# Allegro board Stereo.brd
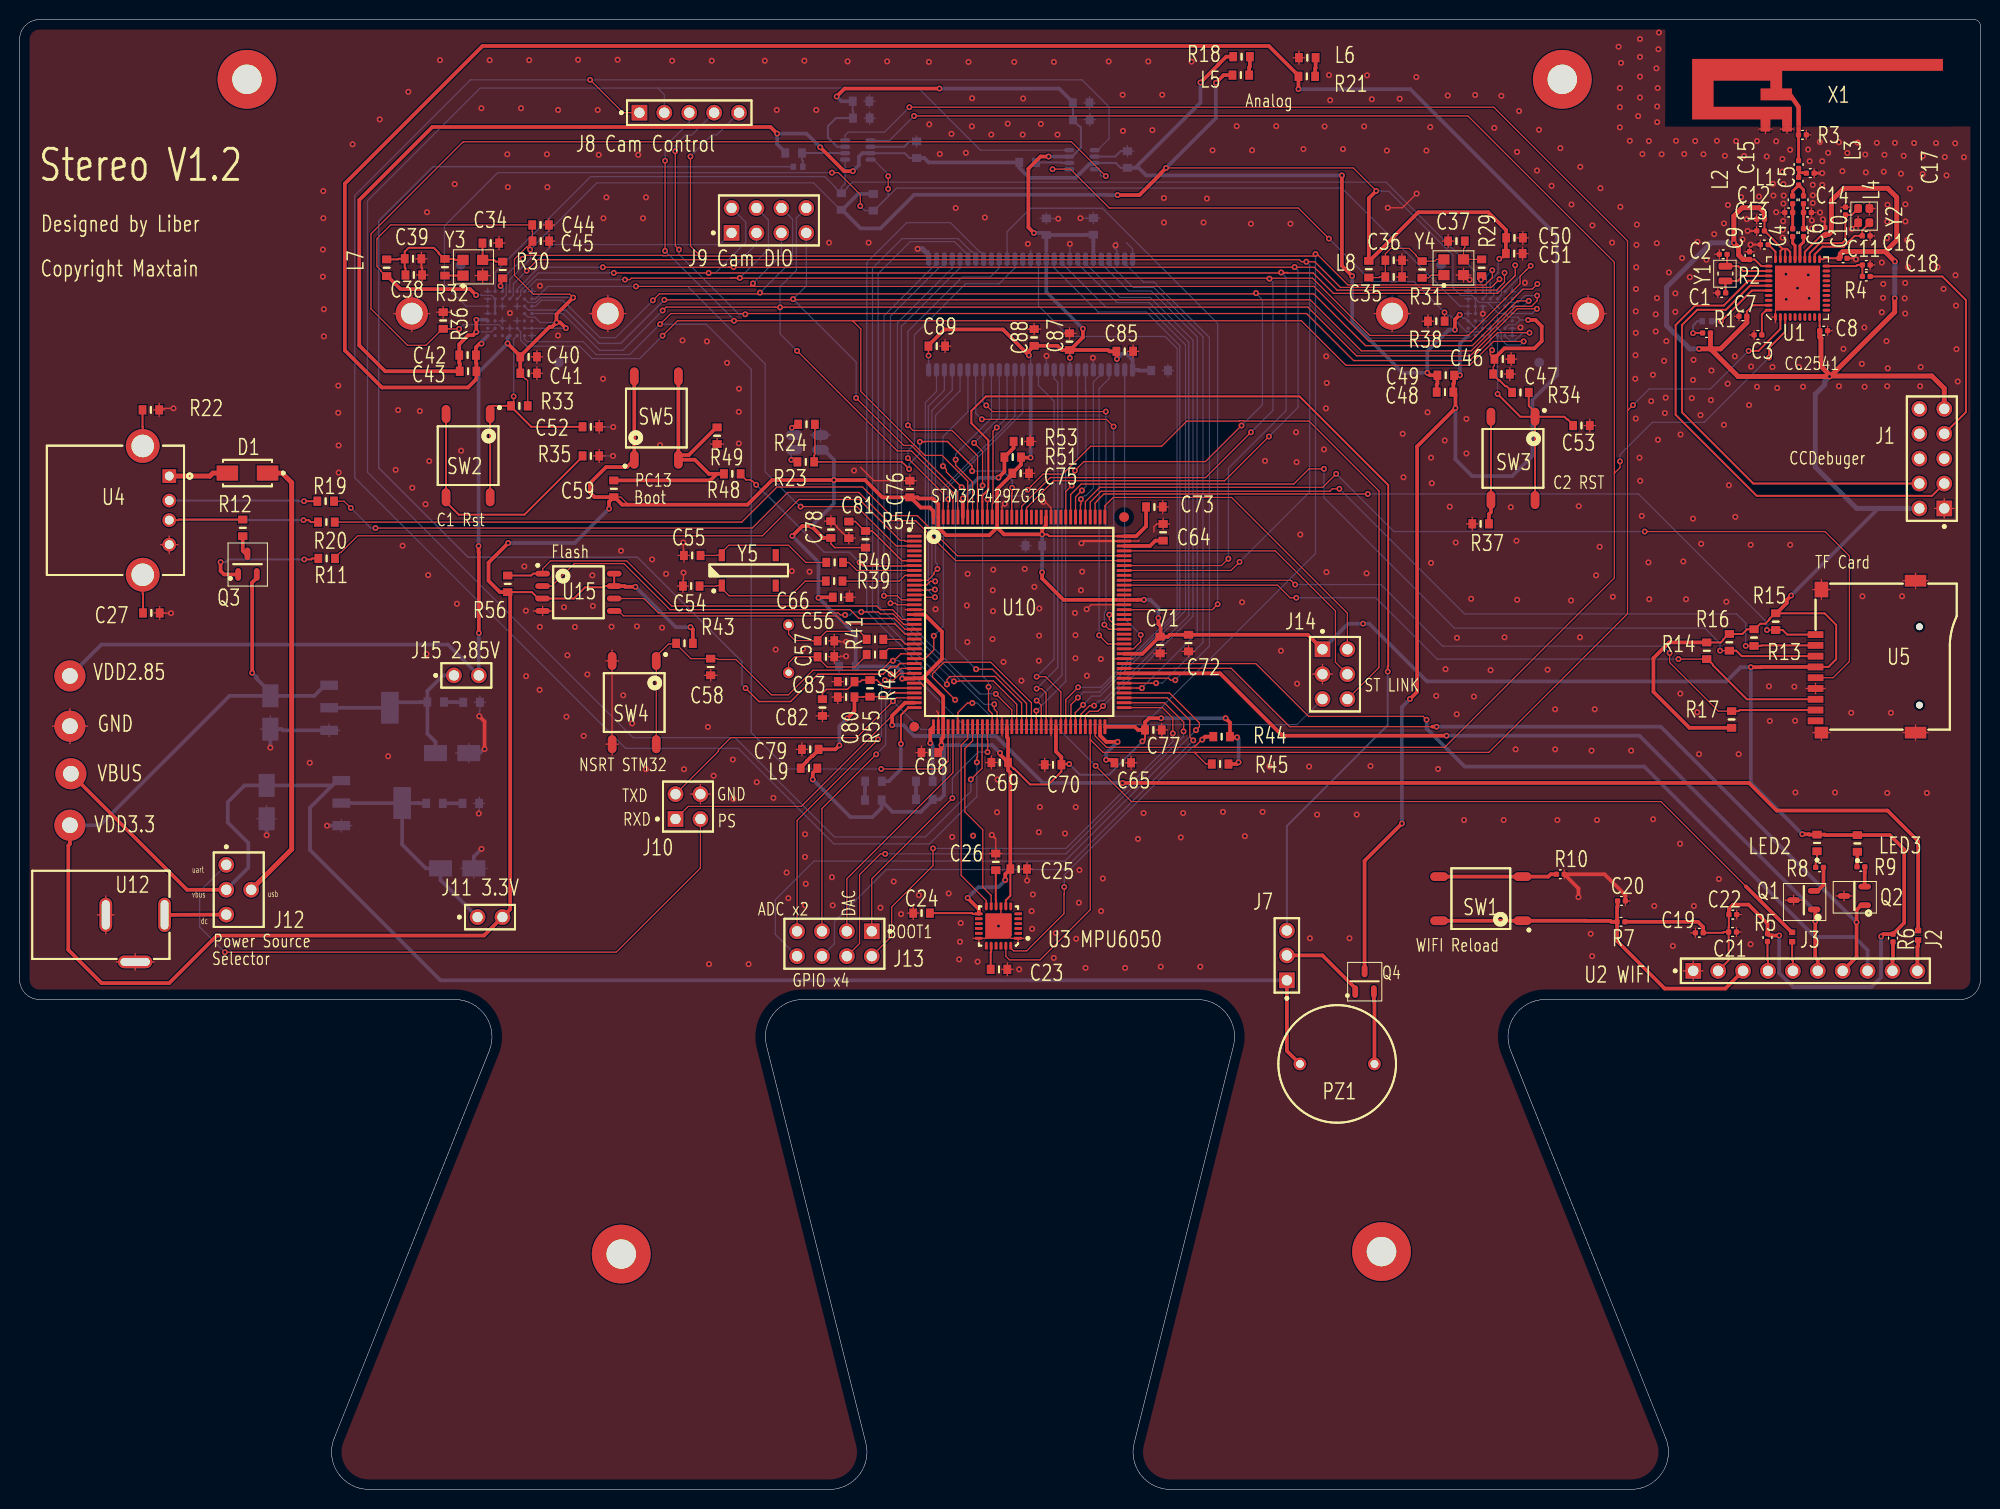
[diagram p0: board, top side]
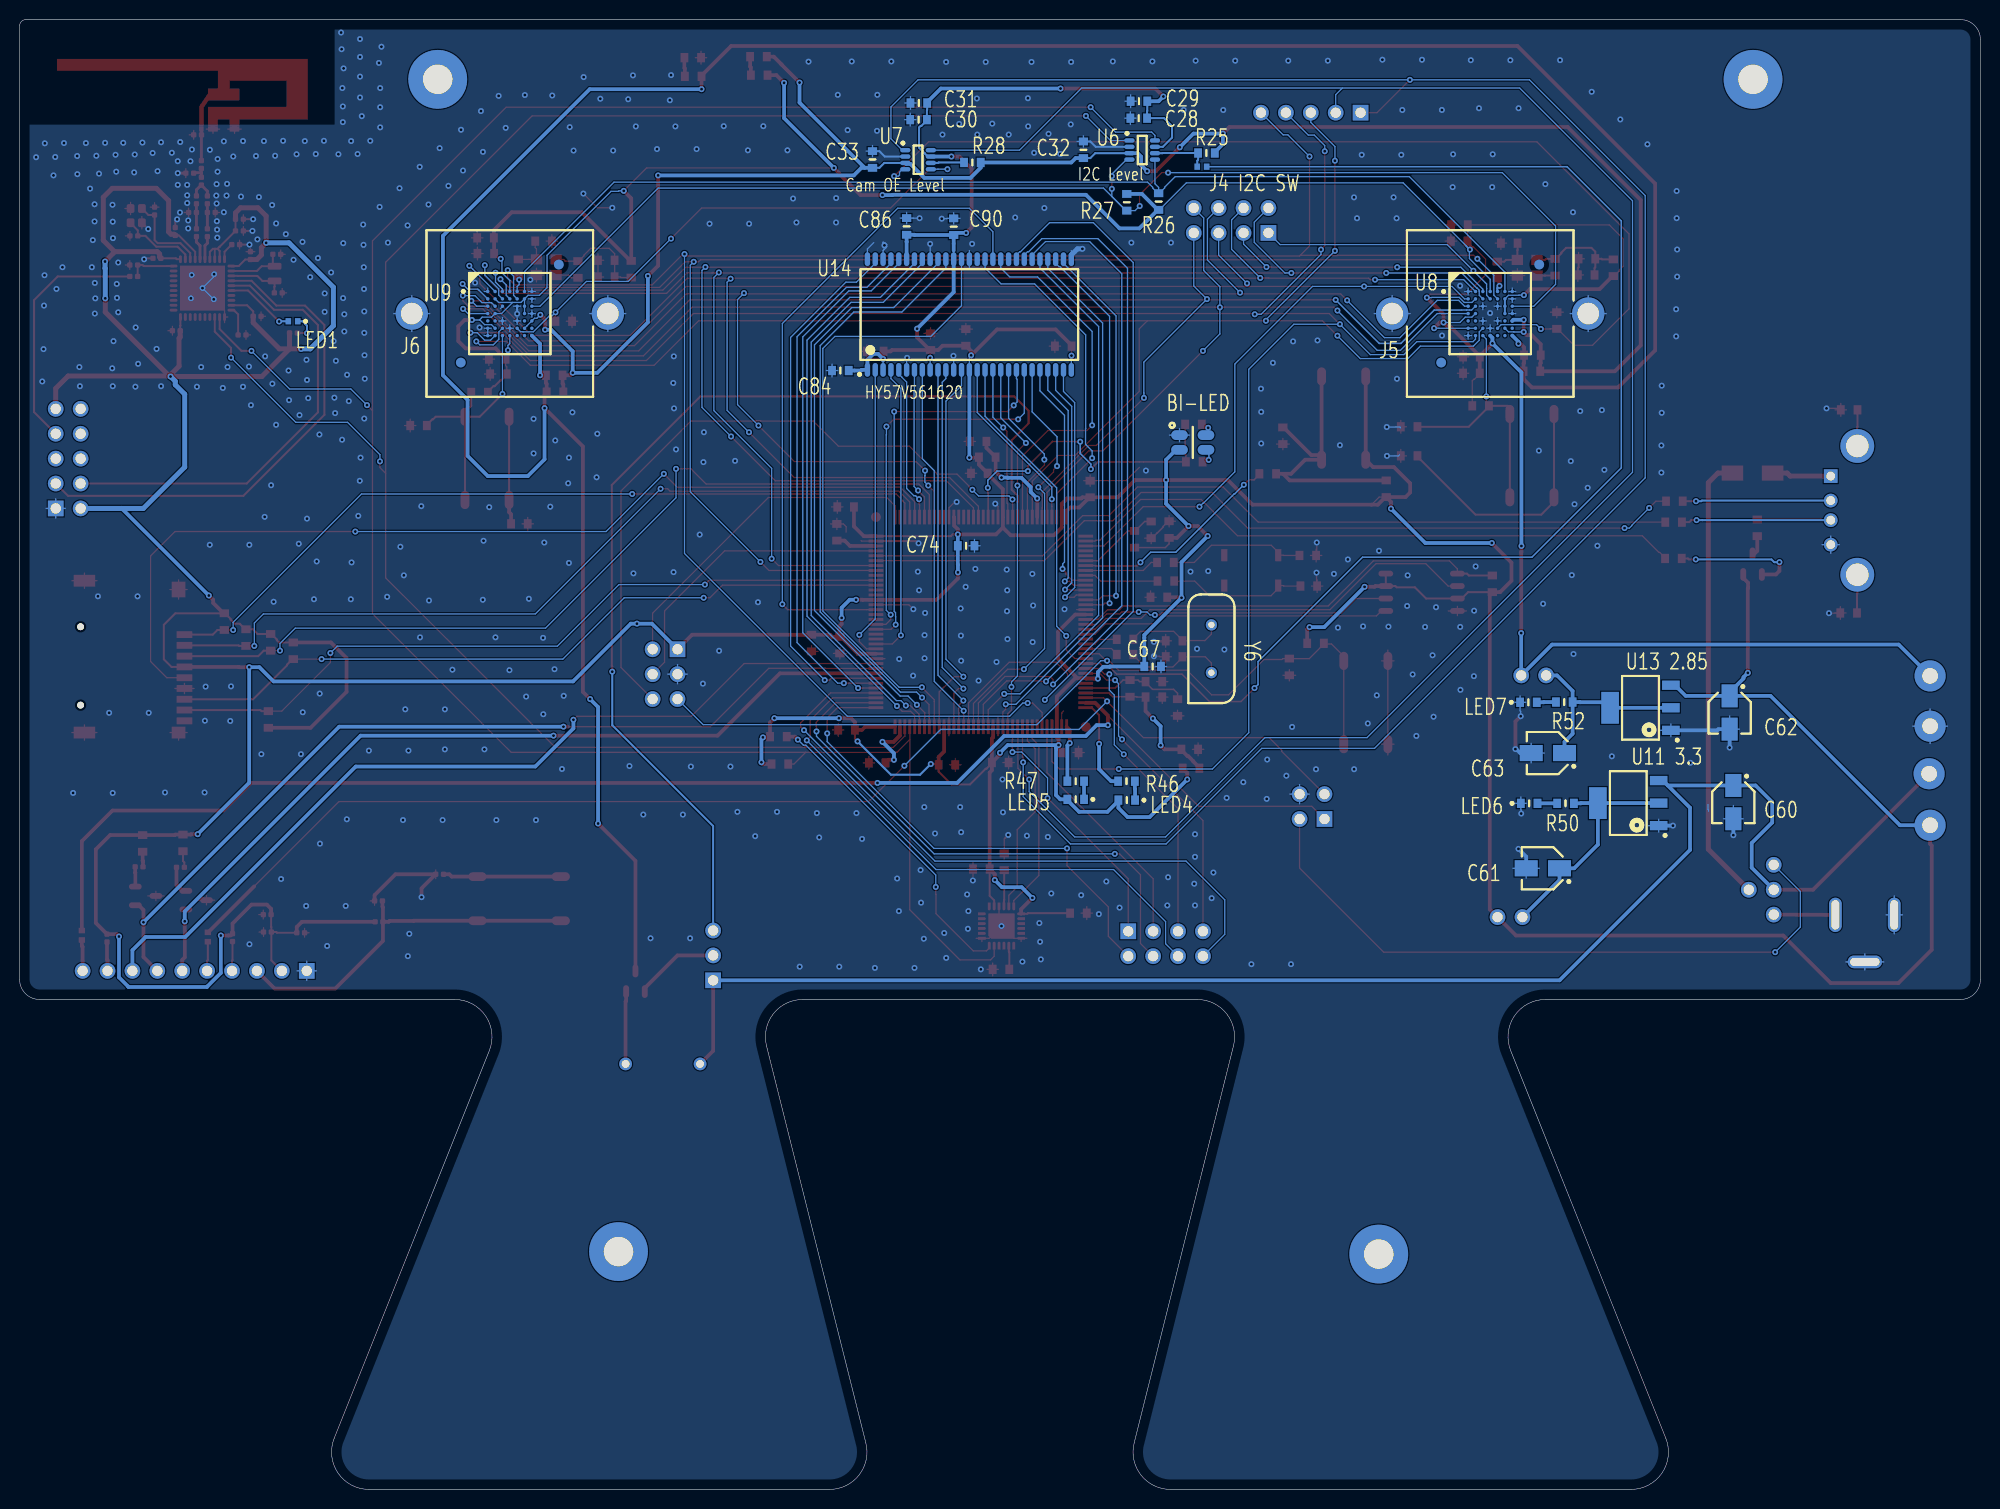
[diagram p1: board, bottom side, seen from below]

Outline 200 x 150 mm; copper layers: TOP, BOTTOM. Coordinates in mm from the lower left corner of the outline.
Outline path: 0,147.97 arc(0.6,149.4) 2.03,150 199.37,150 arc(199.81,149.81) 200,149.36 200,52.03 arc(199.4,50.6) 197.97,50 155.63,50 arc(152.47,48.33) 152.09,44.77 167.91,5.23 arc(167.53,1.67) 164.37,0 117.38,0 arc(114.38,1.47) 113.68,4.73 123.82,45.27 arc(123.12,48.53) 120.12,50 79.88,50 arc(76.88,48.53) 76.18,45.27 86.32,4.73 arc(85.62,1.47) 82.62,0 35.63,0 arc(32.47,1.67) 32.09,5.23 47.91,44.77 arc(47.53,48.33) 44.37,50 2.03,50 arc(0.6,50.6) 0,52.03 0,147.97

## Placement (name value [footprint] x y rotation side)
C1  15pF  [CAPC1005X60L]  174.02 122.11 180 top
C2  15pF  [CAPC1005X60L]  174.17 126.05 180 top
C3  1uF  [CAPC1005X60L]  176.91 117.82 0 top
C4  18pF  [CAPC1005X60L]  180.85 127.85 90 top
C5  1pF  [CAPC1005X60L]  180.85 131.2 90 top
C6  18pF  [CAPC1005X60L]  181.97 127.85 90 top
C7  1uF  [CAPC1005X60L]  176.17 119.72 180 top
C8  100nF  [CAPC1005X60L]  183.62 118.25 0 top
C9  100nF  [CAPC1005X60L]  176.45 125.51 90 top
C10  100nF  [CAPC1005X60L]  184.12 127.98 90 top
C11  100nF  [CAPC1005X60L]  185.6 125.64 0 top
C12  100nF  [CAPC1005X60L]  177.98 128.44 180 top
C13  220pF  [CAPC1005X60L]  177.98 129.63 180 top
C14  1pF  [CAPC1005X60L]  181.97 130.31 0 top
C15  1pF  [CAPC1005X60L]  182.25 134.33 0 top
C16  12pF  [CAPC1005X60L]  188.75 127.93 180 top
C17  12pF  [CAPC1005X60L]  186.23 130.06 90 top
C18  1nF  [CAPC1005X60L]  187.96 124.96 0 top
C19  47uF  [CAPC1005X60L]  171.73 56.81 180 top
C20  100nF  [CAPC1005X60L]  162.99 60.06 0 top
C21  10uF  [CAPC1005X60L]  174.32 56.88 0 top
C22  100nF  [CAPC1005X60L]  174.35 58.66 0 top
C23  2.2nF  [C0603]  99.9 53.07 0 top
C24  10nF  [C0603]  92 58.81 0 top
C25  0.1uF  [C0603]  101.91 63.31 0 top
C26  0.1uF  [C0603]  99.57 64.05 270 top
C27  DNP  [C0603]  13.44 89.45 0 top
C28  1uF  [C0603]  85.85 139.94 0 bottom
C29  0.1uF  [C0603]  85.83 141.67 0 bottom
C30  1uF  [C0603]  108.31 139.79 0 bottom
C31  0.1uF  [C0603]  108.28 141.49 0 bottom
C32  0.1uF  [C0603]  91.49 136.72 90 bottom
C33  0.1uF  [C0603]  113 135.72 90 bottom
C34  33pF  [C0603]  48.06 127.19 0 top
C35  10uF  [C0603]  140.16 123.74 0 top
C36  100nF  [C0603]  140.16 125.44 0 top
C37  33pF  [C0603]  146.56 127.39 180 top
C38  10uF  [C0603]  40.21 123.94 0 top
C39  100nF  [C0603]  40.13 125.59 0 top
C40  0.1uF  [C0603]  51.92 115.58 0 top
C41  1uF  [C0603]  51.92 113.91 0 top
C42  0.1uF  [C0603]  45.69 115.76 0 top
C43  1uF  [C0603]  45.75 114.11 0 top
C44  0.1uF  [C0603]  53.14 129.04 0 top
C45  1uF  [C0603]  53.16 127.39 0 top
C46  0.1uF  [C0603]  151.28 115.35 0 top
C47  1uF  [C0603]  151.16 113.83 0 top
C48  0.1uF  [C0603]  145.39 111.98 0 top
C49  1uF  [C0603]  145.47 113.7 0 top
C50  0.1uF  [C0603]  152.48 127.72 0 top
C51  1uF  [C0603]  152.45 126.12 0 top
C52  100nF  [C0603]  58.27 108.45 0 top
C53  100nF  [C0603]  159.31 108.57 0 top
C54  6.8pF  [C0603]  68.5 92.19 180 top
C55  6.8pF  [C0603]  68.61 95.31 180 top
C56  20pF  [C0603]  82.25 86.6 0 top
C57  20pF  [C0603]  82.25 84.98 0 top
C58  100nF  [C0603]  70.49 83.93 270 top
C59  100nF  [C0603]  60.6 102.12 90 top
C60  10uF ALUMINUM  [CAP_ALUM]  25.2 70.14 270 bottom
C61  22uF ALUMINUM  [CAP_ALUM]  44.63 63.39 0 bottom
C62  10uF ALUMINUM  [CAP_ALUM]  25.58 79.29 270 bottom
C63  22uF ALUMINUM  [CAP_ALUM]  44.12 75.15 0 bottom
C64  2.2uF  [C0603]  116.64 97.68 90 top
C65  2.2uF  [C0603]  112.52 74.16 0 top
C66  100nF  [C0603]  83.79 91.05 0 top
C67  100nF  [C0603]  84.43 83.99 180 bottom
C68  100nF  [C0603]  92.84 75.2 180 top
C69  100nF  [C0603]  99.97 74.18 180 top
C70  100nF  [C0603]  105.41 73.95 180 top
C71  100nF  [C0603]  116.33 86.17 270 top
C72  100nF  [C0603]  119.23 86.37 270 top
C73  100nF  [C0603]  115.75 100.27 0 top
C74  100nF  [C0603]  103.45 96.3 180 bottom
C75  100nF  [C0603]  102.11 103.7 0 top
C76  100nF  [C0603]  90.81 102.1 90 top
C77  100nF  [C0603]  115.65 77.51 0 top
C78  100nF  [C0603]  82.75 97.96 90 top
C79  1uF  [C0603]  80.65 75.53 180 top
C80  100nF  [C0603]  84.3 80.86 180 top
C81  1uF  [C0603]  84.58 97.93 90 top
C82  1uF  [C0603]  81.89 79.79 90 top
C83  100nF  [C0603]  84.3 82.44 0 top
C84  100nF  [C0603]  116.28 114.19 0 bottom
C85  100nF  [C0603]  112.73 116.14 0 top
C86  100nF  [C0603]  109.53 128.89 90 bottom
C87  100nF  [C0603]  107.09 117.13 90 top
C88  100nF  [C0603]  103.48 117.56 90 top
C89  100nF  [C0603]  93.55 116.67 0 top
C90  100nF  [C0603]  104.72 128.87 90 bottom
D1  IN5819  [1N5819_SS12]  23.24 103.72 180 top
D2  LED BI-COLOUR  [LED_BICOLOR]  80.34 106.85 180 bottom
J1  CC_Debugger  [HEADER2X5]  196.32 100.11 90 top
J2  STRXD2USRTX  [SWJ]  193.65 56.55 90 top
J3  STTXD2USR  [SWJ]  180.8 56.38 270 top
J4  JUMPER  [SWJ]  79.4 134.99 180 bottom
J5  CameraBase  [CSBASE]  50 120 180 bottom
J6  CameraBase  [CSBASE]  150 120 180 bottom
J7  HEADER 3  [HEADER1X3S]  129.26 51.96 90 top
J8  CAMERA CONTROL  [HEADER1X5S]  63.22 140.5 0 top
J9  CAMERA DATA  [HEADER2X4S]  72.62 128.23 0 top
J10  UART  [HEADER2X2S]  66.9 68.41 0 top
J11  Idd  [HEADER1X2S]  46.71 58.41 0 top
J12  Power Source  [HEADERSW3]  21.08 63.74 270 top
J13  HEADER 4X2  [HEADER2X4S]  86.92 56.96 180 top
J14  ST-LINK  [HEADER2X3S]  132.89 85.74 270 top
J15  Idd  [HEADER1X2S]  44.3 83.07 0 top
L1  2nH  [INDC1005X60L]  180.85 130.31 180 top
L2  1nH  [INDC1005X60L]  181.46 133.11 90 top
L3  3nH  [INDC1005X60L]  181.46 134.81 90 top
L4  2nH  [INDC1005X60L]  181.97 131.2 90 top
L5  10uH  [L0603]  124.56 144.34 180 top
L6  10uH  [L0603]  131.34 146.11 0 top
L7  10uH  [L0603]  37.44 124.68 90 top
L8  10uH  [L0603]  137.62 124.52 270 top
L9  BEAD  [L0603]  80.52 73.6 180 top
LED1  RED  [LED0402]  172.11 119.21 0 bottom
LED2  LED  [LED0603]  183.34 65.98 90 top
LED3  LED  [LED0603]  187.45 65.93 90 top
LED4  RED  [LED0603]  87.07 70.35 0 bottom
LED5  RED  [LED0603]  92.28 70.42 0 bottom
LED6  RED  [LED0603]  46.03 70.02 180 bottom
LED7  GREEN  [LED0603]  46.1 80.33 180 bottom
NOREF  -  [unnamed]  138.91 24.27 0 top
NOREF#2  -  [unnamed]  23.19 143.9 0 top
NOREF#3  -  [unnamed]  157.35 143.9 0 top
NOREF#4  -  [unnamed]  61.37 24.02 0 top
PZ1  Bell  [BUZZ]  134.39 43.42 0 top
Q1  -  [8550]  181.99 60.13 180 top
Q2  8550PNP  [8550]  187.15 60.57 180 top
Q3  -  [8550]  23.24 94.42 90 top
Q4  -  [8550]  137.19 51.85 90 top
R1  330R  [RESC1005X40L]  172.47 118.02 180 top
R2  56K-1%  [RESC1005X40L]  178.36 127.04 180 top
R3  0,DNM  [RESC1005X40L]  182.25 138.24 180 top
R4  2K7  [RESC1005X40L]  187.96 123.79 0 top
R5  10K  [RESC1005X40L]  178.28 55.92 90 top
R6  10K  [RESC1005X40L]  191.08 55.87 90 top
R7  10K  [RESC1005X40L]  162.94 57.92 0 top
R8  510  [RESC1005X40L]  184 63.49 180 top
R9  510  [RESC1005X40L]  188.21 63.54 180 top
R10  100R  [RESC1005X40L]  157.56 62.78 180 top
R11  10K  [R0603]  31.32 95.01 180 top
R12  1K5  [R0603]  22.76 98.13 90 top
R13  10K  [R0603]  176.91 86.93 90 top
R14  10K  [R0603]  172.09 85.59 90 top
R15  10K  [R0603]  179.12 88.56 90 top
R16  10K  [R0603]  174.4 86.45 90 top
R17  10K  [R0603]  174.63 78.57 270 top
R18  0ohm  [R0603]  124.64 146.22 0 top
R19  0R  [R0603]  31.22 100.85 180 top
R20  0R  [R0603]  31.29 98.72 180 top
R21  0ohm  [R0603]  131.29 144.21 180 top
R22  DNP  [R0603]  13.39 110.17 180 top
R23  330R  [R0603]  80.19 104.86 180 top
R24  330R  [R0603]  80.26 108.7 180 top
R25  4K7  [R0603]  78.94 136.39 180 bottom
R26  1K5  [R0603]  83.82 131.43 270 bottom
R27  1K5  [R0603]  87.07 131.36 90 bottom
R28  4K7  [R0603]  102.82 135.42 0 bottom
R29  33R  [R0603]  149.12 124.68 270 top
R30  33R  [R0603]  49.28 124.45 270 top
R31  10K  [R0603]  143.05 124.5 90 top
R32  10K  [R0603]  43.38 124.73 90 top
R33  10K  [R0603]  50.98 110.58 0 top
R34  10K  [R0603]  153.09 111.95 180 top
R35  100R  [R0603]  58.27 105.47 180 top
R36  10K  [R0603]  43.21 119.29 270 top
R37  100R  [R0603]  149.02 98.54 0 top
R38  10K  [R0603]  144.5 119.21 0 top
R39  0R  [R0603]  83.08 92.7 180 top
R40  0R  [R0603]  83.13 94.6 180 top
R41  0R  [R0603]  87.25 86.75 180 top
R42  220R  [R0603]  87.25 85.2 180 top
R43  100K  [R0603]  67.82 86.35 0 top
R44  1K5  [R0603]  122.61 76.82 0 top
R45  1K5  [R0603]  122.45 74.03 0 top
R46  510R  [R0603]  87.1 72.28 180 bottom
R47  510R  [R0603]  92.28 72.28 180 bottom
R48  330R  [R0603]  72.7 103.64 0 top
R49  100K  [R0603]  71.15 107.53 90 top
R50  1K  [R0603]  42.32 70.02 180 bottom
R51  NA  [R0603]  101.3 105.35 0 top
R52  1K  [R0603]  42.44 80.35 180 bottom
R53  510  [R0603]  102.24 106.95 180 top
R54  0R  [R0603]  86.28 96.96 270 top
R55  0R  [R0603]  86.74 81.75 90 top
R56  4K7  [R0603]  49.78 92.42 270 top
SW1  SWREST  [SWKEY]  149.05 60.29 180 top
SW2  SWREST  [SWKEY]  45.75 105.5 270 top
SW3  SWREST  [SWKEY]  152.32 105.22 270 top
SW4  SwRst  [SWKEY]  62.69 80.3 270 top
SW5  SwRst  [SWKEY]  64.95 109.33 90 top
TP1  VBUS  [TP]  5.23 73.04 0 top
TP2  VDD3.3  [TP]  5.13 67.78 0 top
TP3  VDD2.85  [TP]  5.13 83.02 0 top
TP4  GND  [TP]  5.13 77.89 0 top
U1  CC2541-VQFN  [QFNFC50P600X600X100-41L]  179.1 119.65 0 top
U2  USR-WIFI232  [USRWIFI]  170.71 52.92 0 top
U3  -  [MPU6050]  99.85 57.49 180 top
U4  USB  [USBA]  15.27 103.42 270 top
U5  TFCard  [TF]  183.19 87.24 90 top
U6  MAX3372E  [MAX3372]  85.5 136.69 180 bottom
U7  MAX3372E  [MAX3372]  108.36 135.7 180 bottom
U8  -  [MT9M111]  50 120 180 bottom
U9  -  [MT9M111]  150 120 180 bottom
U10  -  [STM32F429ZGT6]  101.96 88.53 0 top
U11  LT1117-3.3  [LT1117]  35.92 70.04 0 bottom
U12  DC005  [DC_005]  8.79 58.64 0 top
U13  LT1117-2.85  [LT1117]  34.67 79.77 0 bottom
U14  HY57V561620  [HY57V561620T]  103.12 119.9 90 bottom
U15  -  [W25X16]  57 91.55 0 top
X1  2.4GHz  [ANTENNA_DN007]  181.46 138.82 0 top
Y1  32.768KHz  [XTAL_FC12MN]  173.99 123.33 90 top
Y2  32MHz  [XTAL_FA128L]  187.53 130.72 270 top
Y3  SG210_54MHz  [OSC50MHZ]  46.23 124.68 90 top
Y4  SG210_54MHz  [OSC50MHZ]  146.28 124.73 90 top
Y5  Crystal_MC306-G-06Q-32.768  [MC306_32768]  74.37 93.79 90 top
Y6  8MHz  [CRYSTAL_HC49S_8MHZ]  78.44 85.79 90 bottom

## Library data of the parts
C1-C3 C16-C18 = CAP-NP
C4-C15 = CAPACITOR
C19 C21 C22 C60-C63 = CAP POL
C20 C23-C59 C64-C90 = CAP NP
D1 = DIODE_0
D2 = LED BI-COLOUR_1
J1 = CC_Debugger
J2-J4 J11 J15 = JUMPER
J5 J6 = HEADER 2
J7 = HEADER 3
J8 = HEADER 5
J9 = HEADER 8
J10 = HEADER 2X2
J12 = HEADER 4_1
J13 = HEADER 4X2
J14 = HEADER 3X2
L1-L8 = INDUCTOR
L9 = BEAD
LED1 = LED_2
LED2-LED7 = LED_1
PZ1 = PIEZO BUZZER_0
Q1-Q4 = PNP BCE_1
R1-R56 = R
SW1-SW5 = SW PUSHBUTTON-SPST-2
TP1-TP4 = TEST POINT
U1 = CC2541
U2 = USR-WIFI232
U3 = MPU6050_1
U4 = USB_4
U5 = TFCard_0
U6 U7 = MAX3372E_1
U8 U9 = MT9M111
U10 = STM32F429ZGT6_0
U11 U13 = LT1117_2
U12 = DC005
U14 = HY57V561620
U15 = W25X16
X1 = ANTENNA_DN007
Y1 = Crystal_2PIN
Y2 = Crystal_4PIN_US
Y3 Y4 = SG210_54MHz
Y5 = CRYSTAL1-4/SM
Y6 = CRYSTAL

## Footprints (pads in the part's own frame, mm; a bottom-side part is the same pattern mirrored in y, then rotated)
1N5819_SS12
  rect 2.2x1.55 smd: A(2.05,0) C(-2.05,0)
8550
  oval 1.3x0.6 smd: 1(-1.05,0.95) 2(-1.05,-0.95) 3(1.05,0)
ANTENNA_DN007
  rect 0.46x0.5 smd: 1(0,0)
  rect 1x0.5 smd: 2(-1.18,0) 3(-3.38,0)
BUZZ
  round 1.3 hole 0.8: 1(-3.8,0) 2(3.8,0)
C0603
  rect 0.8x0.95 smd: 1(-0.85,0) 2(0.85,0)
CAP_ALUM
  rect 2.35x1.65 smd: 1(-1.7,0) 2(1.7,0)
CAPC1005X60L
  custom 0.55x0.54 smd: 1(0,0) 2(0.8,0)
CRYSTAL_HC49S_8MHZ
  round 1.15 hole 0.65: 1(-2.44,0) 2(2.44,0)
CSBASE
  round 3.3 hole 2.2: 1(-10,0) 2(10,0)
DC_005
  oval 3.5x1.3 hole 3x0.8: 2(3,-4.8)
  oval 1.3x3.5 hole 0.8x3: 3(0,0) 4(6,0)
HEADER1X2S
  round 1.6 hole 1.05: 1(0,0) 2(2.54,0)
HEADER1X3S
  rect 1.6x1.6 hole 1.05: 1(0,0)
  round 1.6 hole 1.05: 2(2.54,0) 3(5.08,0)
HEADER1X5S
  rect 1.6x1.6 hole 1.05: 1(0,0)
  round 1.6 hole 1.05: 2(2.54,0) 3(5.08,0) 4(7.62,0) 5(10.16,0)
HEADER2X2S
  rect 1.6x1.6 hole 1.05: 1(0,0)
  round 1.6 hole 1.05: 2(0,2.54) 3(2.54,0) 4(2.54,2.54)
HEADER2X3S
  rect 1.6x1.6 hole 1.05: 1(0,0)
  round 1.6 hole 1.05: 2(0,2.54) 3(2.54,0) 4(2.54,2.54) 5(5.08,0) 6(5.08,2.54)
HEADER2X4S
  rect 1.6x1.6 hole 1.05: 1(0,0)
  round 1.6 hole 1.05: 2(0,2.54) 3(2.54,0) 4(2.54,2.54) 5(5.08,0) 6(5.08,2.54) 7(7.62,0) 8(7.62,2.54)
HEADER2X5
  rect 1.6x1.6 hole 1.05: 1(0,0)
  round 1.6 hole 1.05: 2(0,2.54) 3(2.54,0) 4(2.54,2.54) 5(5.08,0) 6(5.08,2.54) 7(7.62,0) 8(7.62,2.54) 9(10.16,0) 10(10.16,2.54)
HEADERSW3
  round 1.6 hole 1.05: 1(2.54,2.54) 2(0,0) 3(5.08,0) 4(2.54,0)
HY57V561620T
  oval 1.4x0.55 smd: 1(-5.65,10.4) 2(-5.65,9.6) 3(-5.65,8.8) 4(-5.65,8) 5(-5.65,7.2) 6(-5.65,6.4) 7(-5.65,5.6) 8(-5.65,4.8) 9(-5.65,4) 10(-5.65,3.2) 11(-5.65,2.4) 12(-5.65,1.6) 13(-5.65,0.8) 14(-5.65,0) 15(-5.65,-0.8) 16(-5.65,-1.6) 17(-5.65,-2.4) 18(-5.65,-3.2) 19(-5.65,-4) 20(-5.65,-4.8) 21(-5.65,-5.6) 22(-5.65,-6.4) 23(-5.65,-7.2) 24(-5.65,-8) 25(-5.65,-8.8) 26(-5.65,-9.6) 27(-5.65,-10.4) 28(5.65,-10.4) 29(5.65,-9.6) 30(5.65,-8.8) 31(5.65,-8) 32(5.65,-7.2) 33(5.65,-6.4) 34(5.65,-5.6) 35(5.65,-4.8) 36(5.65,-4) 37(5.65,-3.2) 38(5.65,-2.4) 39(5.65,-1.6) 40(5.65,-0.8) 41(5.65,0) 42(5.65,0.8) 43(5.65,1.6) 44(5.65,2.4) 45(5.65,3.2) 46(5.65,4) 47(5.65,4.8) 48(5.65,5.6) 49(5.65,6.4) 50(5.65,7.2) 51(5.65,8) 52(5.65,8.8) 53(5.65,9.6) 54(5.65,10.4)
INDC1005X60L
  custom 0.55x0.54 smd: 1(0,0) 2(0.8,0)
L0603
  rect 0.8x0.95 smd: 1(-0.85,0) 2(0.85,0)
LED0402
  rect 0.57x0.64 smd: 1(-0.48,0) 2(0.48,0)
LED0603
  rect 0.8x0.95 smd: A(0.85,0) C(-0.85,0)
LED_BICOLOR
  oval 1.7x1 smd: 1(-1.35,0.75) 2(1.35,0.75) 3(1.35,-0.75) 4(-1.35,-0.75)
LT1117
  rect 1.8x0.95 smd: 1(-3.1,2.3) 2(-3.1,0) 3(-3.1,-2.3)
  rect 1.8x3.25 smd: 4(3.1,0)
MAX3372
  oval 1.05x0.45 smd: 1(-1.3,0.975) 2(-1.3,0.325) 3(-1.3,-0.325) 4(-1.3,-0.975) 5(1.3,-0.975) 6(1.3,-0.325) 7(1.3,0.325) 8(1.3,0.975)
MC306_32768
  rect 1.24x0.64 smd: 1(-1.55,2.75) 2(-1.55,-2.75) 3(1.55,-2.75) 4(1.55,2.75)
MPU6050
  rect 0.8x0.3 smd: 1(-2,1.25)
  custom 0.8x0.3 smd: 2(-2,0.75) 3(-2,0.25) 4(-2,-0.25) 5(-2,-0.75) 6(-2,-1.25) 13(2,-1.25) 14(2,-0.75) 15(2,-0.25) 16(2,0.25) 17(2,0.75) 18(2,1.25)
  custom 0.3x0.8 smd: 7(-1.25,-2) 8(-0.75,-2) 9(-0.25,-2) 10(0.25,-2) 11(0.75,-2) 12(1.25,-2) 19(1.25,2) 20(0.75,2) 21(0.25,2) 22(-0.25,2) 23(-0.75,2) 24(-1.25,2)
  custom 2.7x2.6 smd: 25(0,0)
MT9M111
  round 1 smd: (-5,-5) (5,5)
  round 0.35 smd: A1(-2.25,2.25) A2(-1.5,2.25) A3(-0.75,2.25) A4(0,2.25) A5(0.75,2.25) A6(1.5,2.25) A7(2.25,2.25) B1(-2.25,1.5) B2(-1.5,1.5) B3(-0.75,1.5) B4(0,1.5) B5(0.75,1.5) B6(1.5,1.5) B7(2.25,1.5) C1(-2.25,0.75) C2(-1.5,0.75) C3(-0.75,0.75) C5(0.75,0.75) C6(1.5,0.75) C7(2.25,0.75) D1(-2.25,0) D2(-1.5,0) D6(1.5,0) D7(2.25,0) E1(-2.25,-0.75) E2(-1.5,-0.75) E3(-0.75,-0.75) E5(0.75,-0.75) E6(1.5,-0.75) E7(2.25,-0.75) F1(-2.25,-1.5) F2(-1.5,-1.5) F3(-0.75,-1.5) F4(0,-1.5) F5(0.75,-1.5) F6(1.5,-1.5) F7(2.25,-1.5) G1(-2.25,-2.25) G2(-1.5,-2.25) G3(-0.75,-2.25) G4(0,-2.25) G5(0.75,-2.25) G6(1.5,-2.25) G7(2.25,-2.25)
OSC50MHZ
  rect 1.05x1.15 smd: 1(-0.8,1) 2(-0.8,-1) 3(0.8,-1) 4(0.8,1)
QFNFC50P600X600X100-41L
  oval 0.3x0.8 smd: 1(0,0) 2(0.5,0) 3(1,0) 4(1.5,0) 5(2,0) 6(2.5,0) 7(3,0) 8(3.5,0) 9(4,0) 10(4.5,0) 21(4.5,5.9) 22(4,5.9) 23(3.5,5.9) 24(3,5.9) 25(2.5,5.9) 26(2,5.9) 27(1.5,5.9) 28(1,5.9) 29(0.5,5.9) 30(0,5.9)
  oval 0.8x0.3 smd: 11(5.2,0.7) 12(5.2,1.2) 13(5.2,1.7) 14(5.2,2.2) 15(5.2,2.7) 16(5.2,3.2) 17(5.2,3.7) 18(5.2,4.2) 19(5.2,4.7) 20(5.2,5.2) 31(-0.7,5.2) 32(-0.7,4.7) 33(-0.7,4.2) 34(-0.7,3.7) 35(-0.7,3.2) 36(-0.7,2.7) 37(-0.7,2.2) 38(-0.7,1.7) 39(-0.7,1.2) 40(-0.7,0.7)
  rect 4.6x4.6 smd: 41(2.25,2.95)
R0603
  rect 0.8x0.95 smd: 1(-0.85,0) 2(0.85,0)
RESC1005X40L
  custom 0.55x0.54 smd: 1(0,0) 2(0.8,0)
STM32F429ZGT6
  round 1 smd: (-10.7,-10.7) (10.7,10.7)
  rect 1.5x0.3 smd: 1(-10.7,8.75) 2(-10.7,8.25) 3(-10.7,7.75) 4(-10.7,7.25) 5(-10.7,6.75) 6(-10.7,6.25) 7(-10.7,5.75) 8(-10.7,5.25) 9(-10.7,4.75) 10(-10.7,4.25) 11(-10.7,3.75) 12(-10.7,3.25) 13(-10.7,2.75) 14(-10.7,2.25) 15(-10.7,1.75) 16(-10.7,1.25) 17(-10.7,0.75) 18(-10.7,0.25) 19(-10.7,-0.25) 20(-10.7,-0.75) 21(-10.7,-1.25) 22(-10.7,-1.75) 23(-10.7,-2.25) 24(-10.7,-2.75) 25(-10.7,-3.25) 26(-10.7,-3.75) 27(-10.7,-4.25) 28(-10.7,-4.75) 29(-10.7,-5.25) 30(-10.7,-5.75) 31(-10.7,-6.25) 32(-10.7,-6.75) 33(-10.7,-7.25) 34(-10.7,-7.75) 35(-10.7,-8.25) 36(-10.7,-8.75) 73(10.7,-8.75) 74(10.7,-8.25) 75(10.7,-7.75) 76(10.7,-7.25) 77(10.7,-6.75) 78(10.7,-6.25) 79(10.7,-5.75) 80(10.7,-5.25) 81(10.7,-4.75) 82(10.7,-4.25) 83(10.7,-3.75) 84(10.7,-3.25) 85(10.7,-2.75) 86(10.7,-2.25) 87(10.7,-1.75) 88(10.7,-1.25) 89(10.7,-0.75) 90(10.7,-0.25) 91(10.7,0.25) 92(10.7,0.75) 93(10.7,1.25) 94(10.7,1.75) 95(10.7,2.25) 96(10.7,2.75) 97(10.7,3.25) 98(10.7,3.75) 99(10.7,4.25) 100(10.7,4.75) 101(10.7,5.25) 102(10.7,5.75) 103(10.7,6.25) 104(10.7,6.75) 105(10.7,7.25) 106(10.7,7.75) 107(10.7,8.25) 108(10.7,8.75)
  rect 0.3x1.5 smd: 37(-8.75,-10.7) 38(-8.25,-10.7) 39(-7.75,-10.7) 40(-7.25,-10.7) 41(-6.75,-10.7) 42(-6.25,-10.7) 43(-5.75,-10.7) 44(-5.25,-10.7) 45(-4.75,-10.7) 46(-4.25,-10.7) 47(-3.75,-10.7) 48(-3.25,-10.7) 49(-2.75,-10.7) 50(-2.25,-10.7) 51(-1.75,-10.7) 52(-1.25,-10.7) 53(-0.75,-10.7) 54(-0.25,-10.7) 55(0.25,-10.7) 56(0.75,-10.7) 57(1.25,-10.7) 58(1.75,-10.7) 59(2.25,-10.7) 60(2.75,-10.7) 61(3.25,-10.7) 62(3.75,-10.7) 63(4.25,-10.7) 64(4.75,-10.7) 65(5.25,-10.7) 66(5.75,-10.7) 67(6.25,-10.7) 68(6.75,-10.7) 69(7.25,-10.7) 70(7.75,-10.7) 71(8.25,-10.7) 72(8.75,-10.7) 109(8.75,10.7) 110(8.25,10.7) 111(7.75,10.7) 112(7.25,10.7) 113(6.75,10.7) 114(6.25,10.7) 115(5.75,10.7) 116(5.25,10.7) 117(4.75,10.7) 118(4.25,10.7) 119(3.75,10.7) 120(3.25,10.7) 121(2.75,10.7) 122(2.25,10.7) 123(1.75,10.7) 124(1.25,10.7) 125(0.75,10.7) 126(0.25,10.7) 127(-0.25,10.7) 128(-0.75,10.7) 129(-1.25,10.7) 130(-1.75,10.7) 131(-2.25,10.7) 132(-2.75,10.7) 133(-3.25,10.7) 134(-3.75,10.7) 135(-4.25,10.7) 136(-4.75,10.7) 137(-5.25,10.7) 138(-5.75,10.7) 139(-6.25,10.7) 140(-6.75,10.7) 141(-7.25,10.7) 142(-7.75,10.7) 143(-8.25,10.7) 144(-8.75,10.7)
SWJ
  rect 0.57x0.64 smd: 1(-0.48,0) 2(0.48,0)
SWKEY
  oval 1.85x0.9 smd: 1(-4.25,2.25) 2(4.25,2.25) 3(4.25,-2.25) 4(-4.25,-2.25)
TF
  round 0.7 hole 0.9 unplated: (-7.2,-10.6) (0.8,-10.6)
  rect 0.7x1.6 smd: 1(0,0) 2(-1.1,0) 3(-2.2,0) 4(-3.3,0) 5(-4.4,0) 6(-5.5,0) 7(-6.6,0) 8(-7.7,0) 9(-8.8,0)
  rect 1.2x2.2 smd: 10(5.5,-10.2) 11(-10,-10.2)
  rect 1.6x1.4 smd: 12(4.6,-0.6)
  rect 1.2x1.4 smd: 13(-10,-0.6)
TP
  round 3.175 hole 1.6: 1(0,0)
unnamed
  round 6 hole 3: (0,0)
USBA
  rect 1.4x1.4 hole 0.9: 1(0,0)
  round 1.4 hole 0.9: 2(2.5,0) 3(4.5,0) 4(7,0)
  round 3.45 hole 2.3: M1(-3.07,-2.71) M2(10.07,-2.71)
USRWIFI
  rect 1.6x1.6 hole 1.05: 1(0,0)
  round 1.6 hole 1.05: 2(2.54,0) 3(5.08,0) 4(7.62,0) 5(10.16,0) 6(12.7,0) 7(15.24,0) 8(17.78,0) 9(20.32,0) 10(22.86,0)
W25X16
  oval 1.5x0.6 smd: 1(-3.65,1.905) 2(-3.65,0.635) 3(-3.65,-0.635) 4(-3.65,-1.905) 5(3.65,-1.905) 6(3.65,-0.635) 7(3.65,0.635) 8(3.65,1.905)
XTAL_FA128L
  custom 0.9x0.798 smd: 1(0,0) 2(1.45,0) 3(1.45,1.15) 4(0,1.15)
XTAL_FC12MN
  custom 0.7x1.402 smd: 1(0,0) 2(1.5,0)

## Nets
AGND: C42.2 C43.2 C48.2 C49.2 Q4.3(C) R21.2 U8.G7(AGND) U9.G7(AGND)
GND: C1.2 C2.2 C3.1 C7.2 C8.2 C9.2 C10.2 C11.2 C12.2 C13.2 C14.2 C15.2 C16.1 C17.2 C18.2 C19.2 C20.2 C21.2 C22.2 C23.2 C24.1 C25.2 C26.1 C27.2 C28.2 C29.2 C30.2 C31.2 C32.2 C33.2 C34.2 C35.2 C36.2 C37.2 C38.2 C39.2 C40.2 C41.2 C44.2 C45.2 C46.2 C47.2 C50.2 C51.2 C52.2 C53.2 C54.2 C55.2 C56.2 C57.2 C58.2 C60.2 C61.2 C62.2 C63.2 C64.2 C65.2 C66.2 C67.2 C68.2 C69.2 C70.2 C71.2 C72.2 C73.2 C74.2 C75.2 C76.2 C77.2 C78.2 C79.2 C80.2 C81.1 C82.1 C83.1 C84.2 C85.2 C86.2 C87.2 C88.2 C89.2 C90.2 D2.1 J1.1(GND) J5.1 J5.2 J6.1 J6.2 J10.4(2) J14.3 L1.2 L6.1 LED6.C(CATHODE) LED7.C(CATHODE) Q1.3(C) Q2.3(C) R2.2 R3.1 R10.1 R22.1 R35.1 R36.1 R37.1 R38.1 R49.1 R53.1 SW4.3 SW4.4 TP4.1 U1.1(GND#1) U1.41(GND#41) U2.1(GND) U3.1(CLKIN) U3.9(AD0) U3.18(GND#18) U3.25(GND#25) U4.4(GND) U5.6(VSS) U5.10(GND#10) U5.11(GND#11) U5.12(GND#12) U5.13(GND#13) U6.2(GND) U7.2(GND) U8.A1(DGND#A1) U8.A7(DGND#A7) U8.B7(DGNDQ#B7) U8.C3(DGNDQ#C3) U8.C5(DGNDQ#C5) U8.D7(DGND#D7) U8.E3(DGNDQ#E3) U8.E5(DGNDQ#E5) U8.F4(STAND_BY) U8.G1(DGND#G1) U9.A1(DGND#A1) U9.A7(DGND#A7) U9.B7(DGNDQ#B7) U9.C3(DGNDQ#C3) U9.C5(DGNDQ#C5) U9.D7(DGND#D7) U9.E3(DGNDQ#E3) U9.E5(DGNDQ#E5) U9.F1(SADDR) U9.F4(STAND_BY) U9.G1(DGND#G1) U10.16(VSS#16) U10.31(VSSA) U10.38(VSS#38) U10.51(VSS#51) U10.61(VSS#61) U10.83(VSS#83) U10.94(VSS#94) U10.107(VSS#107) U10.120(VSS#120) U10.130(VSS#130) U11.1(GND) U12.2(GND#2) U12.3(GND#3) U13.1(GND) U14.6(VSSQ#6) U14.12(VSSQ#12) U14.28(VSS#28) U14.41(VSS#41) U14.46(VSSQ#46) U14.52(VSSQ#52) U14.54(VSS#54) U15.4(GND) X1.2(GND_2) X1.3(GND_3) Y2.2 Y2.4 Y3.2(GND) Y4.2(GND)
VBAT: C81.2 R54.1 U10.6(VBAT)
VBUS: C60.1 J7.1 J12.4 PZ1.1(+) TP1.1 U11.3(IN)
VDD2.85: C40.1 C41.1 C44.1 C45.1 C46.1 C47.1 C50.1 C51.1 J15.2 L5.2 L7.1 L8.1 R26.2 R27.2 R33.2 R34.2 TP3.1 U8.A4(VDDQ#A4) U8.B2(VDD#B2) U8.B6(VDD#B6) U8.C6(VDDQ#C6) U8.D2(VDDQ#D2) U8.D6(VDDQ#D6) U8.F1(SADDR) U8.F2(VDD#F2) U8.G4(VDDQ#G4) U9.A4(VDDQ#A4) U9.B2(VDD#B2) U9.B6(VDD#B6) U9.C6(VDDQ#C6) U9.D2(VDDQ#D2) U9.D6(VDDQ#D6) U9.F2(VDD#F2) U9.G4(VDDQ#G4)
A0: U10.10(PF0) U14.23(A0)
A1: U10.11(PF1) U14.24(A1)
A2: U10.12(PF2) U14.25(A2)
A3: U10.13(PF3) U14.26(A3)
A4: U10.14(PF4) U14.29(A4)
A5: U10.15(PF5) U14.30(A5)
A6: U10.50(PF12) U14.31(A6)
A7: U10.53(PF13) U14.32(A7)
A8: U10.54(PF14) U14.33(A8)
A9: U10.55(PF15) U14.34(A9)
A10: U10.56(PG0) U14.22(A10/AP)
A11: U10.57(PG1) U14.35(A11)
ADC0: J13.5 U10.28(PC2)
ADC1: J13.7 U10.29(PC3)
BA0: U10.89(PG4) U14.20(BA0)
BA1: U10.90(PG5) U14.21(BA1)
BEEP: J7.3 U10.134(PB4)
BOOT0: R51.1 R53.2 U10.138(BOOT0)
BOOT1: J13.1 U10.48(PB2/BOOT1)
C1D0: J9.1 U8.B4(DOUT0) U9.B4(DOUT0) U10.101(PA9)
C1D1: J9.2 U8.B3(DOUT1) U9.B3(DOUT1) U10.102(PA10)
C1D2: J9.3 U8.A3(DOUT2) U9.A3(DOUT2) U10.125(PG10)
C1D3: J9.4 U8.A2(DOUT3) U9.A2(DOUT3) U10.126(PG11)
C1D4: J9.5 U8.B1(DOUT4) U9.B1(DOUT4) U10.3(PE4)
C1D5: J9.6 U8.C1(DOUT5) U9.C1(DOUT5) U10.117(PD3)
C1D6: J9.7 U8.C2(DOUT6) U9.C2(DOUT6) U10.139(PB8)
C1D7: J9.8 U8.D1(DOUT7) U9.D1(DOUT7) U10.140(PB9)
C1HSYC: J8.4 U8.G2(LINE_VALID) U9.G2(LINE_VALID) U10.40(PA4)
C1OE: J8.1 U7.1(VCC2) U10.46(PB0)
C1OE#: R36.2 U7.4(VL2) U8.F5(O\E\)
C1PIXCLK: J8.5 U8.B5(PIXCLK) U9.B5(PIXCLK) U10.42(PA6)
C1VSYN: J8.3 U8.F3(FRAME_VALID) U9.F3(FRAME_VALID) U10.137(PB7)
C1XCLK: R30.2 U8.A5(CLK_IN)
C2OE: J8.2 U7.8(VCC1) U10.47(PB1)
C2OE#: R38.2 U7.5(VL1) U9.F5(O\E\)
C2XCLK: R29.2 U9.A5(CLK_IN)
CC2541_RF_N: C4.1 U1.26(RF_N)
CC2541_RF_P: C6.1 U1.25(RF_P)
CI2C: J4.2 U10.27(PC1)
CSCL: R26.1 U6.5(VL1) U8.A6(SCLK) U9.A6(SCLK)
CSDA: R27.1 U6.4(VL2) U8.C7(SDATA) U9.C7(SDATA)
D0: U10.85(PD14) U14.2(DQ0)
D1: U10.86(PD15) U14.4(DQ1)
D2: U10.114(PD0) U14.5(DQ2)
D3: U10.115(PD1) U14.7(DQ3)
D4: U10.58(PE7) U14.8(DQ4)
D5: U10.59(PE8) U14.10(DQ5)
D6: U10.60(PE9) U14.11(DQ6)
D7: U10.63(PE10) U14.13(DQ7)
D8: U10.64(PE11) U14.42(DQ8)
D9: U10.65(PE12) U14.44(DQ9)
D10: U10.66(PE13) U14.45(DQ10)
D11: U10.67(PE14) U14.47(DQ11)
D12: U10.68(PE15) U14.48(DQ12)
D13: U10.77(PD8) U14.50(DQ13)
D14: U10.78(PD9) U14.51(DQ14)
D15: U10.79(PD10) U14.53(DQ15)
DAC: J13.3 U10.41(PA5)
DC: J1.3(DC) U1.34(P2_2/DC)
DD: J1.4(DD) U1.35(P2_1/DD)
DUAL_LED: R23.1 R24.1 U10.128(PG13)
INLED1: R46.1 U10.36(PA2)
INLED2: R47.1 U10.37(PA3)
MPU_FSY: U3.11(FSYNC) U10.45(PC5)
MPU_INT: U3.12(INT) U10.44(PC4)
NBL0: U10.141(PE0) U14.15(LDQM)
NBL1: U10.142(PE1) U14.39(UDQM)
NLINKU: Q1.1(B) U2.6(PWM_1) U10.80(PD11)
NREADYU: Q2.1(B) U2.7(PWM_2) U10.81(PD12)
NRELOADU: C20.1 R7.1 SW1.1 SW1.2 U2.3(NRELOAD)
NRST: C58.1 J14.5 R43.1 SW4.1 SW4.2 U10.25(NRST)
NRST_258567: J1.7(NRST) R4.2
P2_0: LED1.2(CATHODE) U1.36(P2_0)
PA13: J14.4 U10.105(PA13)
PA14: J14.2 U10.109(PA14)
PB3: J14.6 U10.133(PB3)
PB12: J13.2 U10.73(PB12)
PB13: J13.4 U10.74(PB13)
PB14: J13.6 U10.75(PB14)
PB15: J13.8 U10.76(PB15)
PC13: R48.2 U10.7(PC13-WKUP2)
PC14: R40.1 U10.8(PC14-OSC32_IN)
PC15: R39.1 U10.9(PC15-OSC32_OUT)
PH0: R41.1 U10.23(PH0-OSC_IN)
PH1: R42.1 U10.24(PH1-OSC_OUT)
POWERFROMUART: J10.3(1) J12.2
POWERFROMUSB: D1.C(K) J12.1
SDCKE1: U10.135(PB5) U14.37(CKE)
SDCLK: U10.93(PG8) U14.38(CLK)
SDIO_CLK: U5.5(CLK) U10.113(PC12)
SDIO_CMD: R16.1 U5.3(CMD) U10.116(PD2)
SDIO_D0: R14.1 U5.7(DAT0) U10.98(PC8)
SDIO_D1: R17.1 U5.8(DAT1) U10.99(PC9)
SDIO_D2: R15.1 U5.1(DAT2) U10.111(PC10)
SDIO_D3: R13.1 U5.2(CD/DAT3) U10.112(PC11)
SDNCAS: U10.132(PG15) U14.17(C\A\S\)
SDNE1: U10.136(PB6) U14.19(C\S\)
SDNRAS: U10.49(PF11) U14.18(R\A\S\)
SDNWE: U10.26(PC0) U14.16(W\E\)
STRXD: J2.2 J10.1(3) U10.35(PA1)
STSCL: R45.1 U1.2(SCL) U3.23(SCL) U6.8(VCC1) U10.69(PB10)
STSDA: R44.1 U1.3(SDA) U3.24(SDA) U6.1(VCC2) U10.70(PB11)
STSPI_MISO: U10.20(PF8) U15.2(DO)
STSPI_MOSI: U10.21(PF9) U15.5(DIO)
STSPI_NSS: R56.1 U10.18(PF6) U15.1(C\S\)
STSPI_SCK: U10.19(PF7) U15.6(CLK)
STTXD: J3.1 J10.2(4) U10.34(PA0-WKUP1)
STVDD: C7.1 C8.1 C9.1 C10.1 C11.1 C12.1 C13.1 C19.1 C21.1 C22.1 C24.2 C25.1 C28.1 C29.1 C30.1 C31.1 C59.1 C62.1 C66.1 C67.1 C68.1 C69.1 C70.1 C71.1 C72.1 C73.1 C74.1 C75.1 C76.1 C77.1 C78.1 C84.1 C85.1 C86.1 C87.1 C88.1 C89.1 C90.1 D2.4 J1.2(VCC) J1.9(3V3) J11.2 J14.1 L9.1 LED2.A(ANODE) LED3.A(ANODE) LED4.A(ANODE) LED5.A(ANODE) Q3.2(E) R1.1 R5.2 R6.2 R7.2 R13.2 R14.2 R15.2 R16.2 R17.2 R43.2 R44.2 R45.2 R51.2 R54.2 R56.2 SW5.1 SW5.2 TP2.1 U1.10(DVDD2) U1.21(AVDD5) U1.24(AVDD3) U1.27(AVDD2) U1.28(AVDD1) U1.29(AVDD4) U1.31(AVDD6) U1.39(DVDD1) U2.2(DVDD) U3.8(VLOGIC) U3.13(VDD) U5.4(VDD) U6.7(VCC) U7.7(VCC) U10.17(VDD#17) U10.30(VDD#30) U10.39(VDD#39) U10.52(VDD#52) U10.62(VDD#62) U10.72(VDD#72) U10.84(VDD#84) U10.95(VDD#95) U10.108(VDD#108) U10.121(VDD#121) U10.131(VDD#131) U10.143(PDR_ON) U10.144(VDD#144) U13.3(IN) U14.1(VDD#1) U14.3(VDDQ#3) U14.9(VDDQ#9) U14.14(VDD#14) U14.27(VDD#27) U14.43(VDDQ#43) U14.49(VDDQ#49) U15.3(W\P\) U15.7(H\O\L\D\) U15.8(VCC)
STVDDA: C79.1 C80.1 L9.2 R55.1 U10.33(VDDA)
STVREF+: C82.2 C83.2 R55.2 U10.32(VREF+)
USB_DM: R19.1 U10.103(PA11)
USB_DP: R20.1 U10.104(PA12)
USB_M: R11.1 U10.2(PE3)
VAA2.85: C32.1 C33.1 C42.1 C43.1 C48.1 C49.1 R18.1 R25.2 R28.1 U6.3(VL) U7.3(VL) U8.E7(VAAPIX) U8.F6(VAA) U9.E7(VAAPIX) U9.F6(VAA)
VCAP1: C65.1 U10.71(VCAP_1)
VCAP2: C64.1 U10.106(VCAP_2)
WPSU: U2.8(PWM_3) U10.82(PD13)
N258513: C1.1 U1.33(P2_3/OSC32K_Q2) Y1.1
N258517: C2.1 U1.32(P2_4/OSC32K_Q1) Y1.2
N258521: R2.1 U1.30(RBIAS)
N258553: C3.2 U1.40(DCOUPL)
N258627: C17.1 U1.23(XOSC_Q2) Y2.1
N258635: C16.2 U1.22(XOSC_Q1) Y2.3
N258759: C18.1 R4.1 U1.20(RST_N)
N258825: LED1.1(ANODE) R1.2
N259215: C4.2 C5.1 L1.1
N259219: C6.2 C14.1 L4.1
N259239: C5.2 L2.1 L4.2
N259251: C15.1 L2.2 L3.1
N259437: L3.2 R3.2 X1.1(FEED_1)
N265978: C54.1 R39.2 Y5.1
N266951: C55.1 R40.2 Y5.4
N267195: C56.1 R41.2 Y6.2
N267337: C57.1 R42.2 Y6.1
N285985: C59.2 R48.1 R49.2 SW5.3 SW5.4
N300508: C23.1 U3.20(CPOUT)
N300650: C26.2 U3.10(REGOUT)
N328917: R12.2 R20.2 U4.3(D+/DP)
N329621: R19.2 U4.2(D-/DM)
N331482: Q3.3(C) R12.1
N331520: Q3.1(B) R11.2
N332992: R22.2 U4.M1(SHL)
N333081: C27.1 U4.M2(SHELL)
N336943: D1.A U4.1(VCC)
N348606: R5.1 U2.4(NRESET)
N348624: R6.1 U2.9(PWR_SW)
N350346: J2.1 U2.10(UART_TX)
N350383: J3.2 U2.5(UART_RX)
N351997: R10.2 SW1.3 SW1.4
N352841: Q1.2(E) R8.1
N352845: Q2.2(E) R9.1
N358002: C52.1 R33.1 SW2.1 SW2.2 U8.G3(R\E\S\E\T\)
N366341: C38.1 C39.1 L7.2 R32.2 Y3.4(VCC)
N366455: R32.1 Y3.1(EN)
N367148: C34.1 R30.1 Y3.3(OUT)
N372779: C35.1 C36.1 L8.2 R31.2 Y4.4(VCC)
N372831: R31.1 Y4.1(EN)
N372891: C37.1 R29.1 Y4.3(OUT)
N373213: C53.1 R34.1 SW3.1 SW3.2 U9.G3(R\E\S\E\T\)
N373269: R37.2 SW3.3 SW3.4
N391929: PZ1.2(-) Q4.2(E)
N392285: J7.2 Q4.1(B)
N419290: C61.1 J11.1 R50.2 U11.2(OUT#2) U11.4(OUT#4)
N419382: LED6.A(ANODE) R50.1
N421353: C63.1 J15.1 R52.2 U13.2(OUT#2) U13.4(OUT#4)
N421387: LED7.A(ANODE) R52.1
N423737: J12.3 U12.4(DCV5)
N432954: D2.3 R23.2
N432958: D2.2 R24.2
N446981: J4.1 R25.1 U6.6(E\N\)
N453683: R28.2 U7.6(E\N\)
N463104: L6.2 R21.1
N463426: L5.1 R18.2
N486322: R35.2 SW2.3 SW2.4
N3522421: LED2.C(CATHODE) R8.2
N3522681: LED3.C(CATHODE) R9.2
N3536300: LED4.C(CATHODE) R46.2
N3536460: LED5.C(CATHODE) R47.2

Pads without a net: J1 5 6 8 10; U1 4 5 6 7 8 9 11 12 13 14 15 16 17 18 19 37 38; U3 2 3 4 5 6 7 14 15 16 17 19 21 22; U5 9; U8 E1 E2 E6 F7 G5 G6; U9 E1 E2 E6 F7 G5 G6; U10 1 4 5 22 43 87 88 91 92 96 97 100 110 118 119 122 123 124 127 129; U14 36 40; Y5 2 3

## Via types
v1: diameter 0.61, hole 0.3, TOP to BOTTOM, 808 vias

## Routing (per net, layer and track width the routed paths; a pad name or vN(x,y) marks a point on that pad's centre or on a via; arc(x,y) is an arc through that point)
AGND: length 283.6
  TOP w0.381: v1(146.91,113.7) C49.2 146.32,112.91 146.24,112.83 C48.2 146.46,111.76 v1(146.46,110.35) 142.55,106.44 142.55,81.39 v1(141.81,80.66) ; v1(141,67.96) 137.19,64.15 Q4.3 ; v1(47.12,116.93) 46.92,116.93 46.54,116.55 C42.2 46.54,114.97 46.6,114.92 C43.2 46.6,113.32 45.74,112.46 36.96,112.46 33.17,116.24 33.17,133.26 47.22,147.31 127.42,147.31 130.44,144.28 R21.2 v1(130.44,142.9)
  BOTTOM w0.381: v1(146.46,110.35) 146.46,105.12 148.16,103.42 152.25,103.42 154.31,105.47 154.31,111.19 156.82,113.7 156.82,127.93 141.85,142.9 v1(130.44,142.9) ; U8.G7 47.12,117.12 v1(47.12,116.93) ; v1(141,67.96) 141,79.84 v1(141.81,80.66) ; v1(146.91,113.7) 146.91,116.91 U9.G7
GND: length 552
  TOP w0.127: C89.2 94.98,116.67 ; C89.2 94.4,116.02 ; C89.2 93.82,116.67 ; C89.2 94.4,117.33 ; C57.2 83.1,85.63 ; C57.2 83.1,84.32 ; C57.2 83.69,84.98 83.74,85.03 v1(84.3,85.03) ; C57.2 82.52,84.98 ; v1(181.35,122.6) 182.45,123.7 v1(182.45,123.94) ; v1(181.35,122.6) v1(180.2,121.45) 179.1,120.35 U1.1 ; v1(181.35,122.6) 181.48,122.6 v1(182.52,121.55) ; U5.11 193.38,78.01 ; U5.11 193.38,76.46 ; U5.11 194.66,77.24 ; U5.11 192.11,77.24 ; R35.1 59.12,106.13 ; R35.1 58.54,105.47 ; R35.1 59.12,104.82 ; R35.1 59.7,105.47 ; C23.2 100.75,53.73 ; C23.2 101.33,53.07 ; C23.2 100.75,52.42 ; C23.2 100.17,53.07 ; 119.23,84.94 C72.2 ; C72.2 119.23,86.1 ; C72.2 118.57,85.52 ; C72.2 119.88,85.52 ; 11.79,53.01 U12.2 ; U12.2 11.79,54.66 ; U12.2 9.86,53.84 ; U12.2 13.72,53.84 ; SW4.4 61.07,84.55 ; SW4.4 59.81,84.55 ; SW4.4 60.44,85.66 ; SW4.4 SW4.3 ; v1(15.7,110.32) 14.39,110.32 R22.1 ; 157.56,63.22 R10.1 157.56,62.33 ; J5.2 40,121.83 ; J5.2 41.83,120 ; J5.2 38.17,120 ; J5.2 40,118.17 ; C53.2 160.16,109.23 ; C53.2 159.58,108.57 ; C53.2 160.74,108.57 ; C53.2 160.16,107.92 ; C41.2 52.77,114.56 ; C41.2 52.77,113.25 ; C41.2 52.19,113.91 ; C41.2 53.35,113.91 ; C34.2 49.49,127.19 ; C34.2 48.33,127.19 ; C34.2 48.91,127.84 ; C34.2 48.91,126.54 ; 97.27,56.24 U3.18 ; U3.18 98.6,56.24 v1(99.85,57.49) ; U3.18 97.85,55.91 ; C77.2 117.07,77.51 ; C77.2 116.5,78.16 ; C77.2 116.5,76.85 ; C77.2 115.92,77.51 ; L6.1 130.49,146.77 ; L6.1 129.92,146.11 ; L6.1 130.49,145.46 ; L6.1 131.07,146.11 ; 180.94,59.66 Q1.3 ; Q1.3 180.11,60.13 ; Q1.3 180.94,60.61 ; Q1.3 181.77,60.13 ; R49.1 71.8,106.68 ; R49.1 70.49,106.68 ; R49.1 71.15,107.26 ; R49.1 71.15,106.1 ; 114.17,96.84 114.12,96.78 U10.107 ; 116.6,99.61 C73.2 ; C73.2 117.18,100.27 ; C73.2 116.02,100.27 ; C73.2 116.6,100.92 ; 175.15,58.21 C22.2 ; C22.2 175.6,58.66 ; C22.2 175.15,59.11 ; J6.1 160,121.83 ; J6.1 158.17,120 ; J6.1 160,118.17 ; J6.1 161.83,120 ; v1(104.42,100.77) 104.6,100.77 105.21,100.17 U10.120 ; J10.4 69.44,71.93 ; J10.4 68.47,70.95 ; J10.4 69.44,69.98 ; J10.4 70.42,70.95 ; 179.1,119.07 U1.1 ; U1.1 178.77,119.65 ; 177.18,128.88 C12.2 177.18,127.99 ; C78.2 82.75,99.38 ; C78.2 82.1,98.8 ; C78.2 82.75,98.23 ; 60.44,74.95 SW4.3 ; SW4.3 61.07,76.05 ; SW4.3 59.81,76.05 ; 98.55,74.18 C69.2 ; C69.2 99.12,74.83 ; C69.2 99.7,74.18 ; C69.2 99.12,73.53 ; 112.79,74.16 C65.2 ; C65.2 113.37,74.81 ; C65.2 113.95,74.16 ; C65.2 113.37,73.5 ; 102.18,63.31 C25.2 ; C25.2 102.75,63.96 ; C25.2 102.75,62.15 v1(102.77,62.14) ; C25.2 103.33,63.31 ; C70.2 104.56,74.61 ; C70.2 103.98,73.95 ; C70.2 104.56,73.3 ; C70.2 105.14,73.95 ; 92.2,81.95 92.2,81.96 92.2,82.01 91.93,82.28 U10.31 ; 59.12,107.79 C52.2 ; C52.2 59.12,109.1 ; C52.2 58.54,108.45 ; C52.2 59.7,108.45 ; C50.2 153.33,128.38 ; C50.2 153.33,127.07 ; C50.2 153.9,127.72 ; C50.2 152.75,127.72 ; 90.57,58.81 C24.1 ; C24.1 91.73,58.81 ; C24.1 91.15,59.47 ; C24.1 91.15,58.16 ; R38.1 143.65,119.87 ; R38.1 144.23,119.21 ; R38.1 143.65,118.56 ; R38.1 143.07,119.21 ; 83.1,85.95 C56.2 ; C56.2 82.52,86.6 ; C56.2 83.67,86.6 ; C56.2 83.1,87.25 ; C56.2 83.2,86.5 v1(84.3,86.5) ; C82.1 81.89,79.52 ; C82.1 81.89,78.37 ; C82.1 82.54,78.94 ; C82.1 81.24,78.94 ; C81.1 84.58,97.66 ; C81.1 85.24,97.08 ; C81.1 84.58,96.5 ; J14.3 133.87,83.2 ; J14.3 132.89,82.22 ; J14.3 131.91,83.2 ; J14.3 132.89,84.18 ; C58.2 70.49,83.66 ; C58.2 69.83,83.08 ; C58.2 71.14,83.08 ; C58.2 70.49,82.51 ; 5.13,76.12 TP4.1 ; TP4.1 6.9,77.89 ; TP4.1 5.13,79.65 ; TP4.1 3.37,77.89 ; 103.48,117.84 C88.2 ; C88.2 102.83,118.41 ; C88.2 103.48,118.99 ; C88.2 104.13,118.41 ; 14.24,109.52 R22.1 ; R22.1 13.66,110.17 ; R22.1 14.24,110.83 ; R22.1 14.81,110.17 ; C9.2 176.9,126.31 ; C9.2 176.01,126.31 ; C9.2 176.45,126.77 ; Y4.2 147.28,124.63 ; Y4.2 146.53,123.93 ; Y4.2 147.43,123.93 ; Y4.2 147.28,123.22 ; C8.2 184.42,118.7 ; C8.2 184.42,117.8 ; C8.2 184.87,118.25 ; C79.2 79.8,76.18 ; C79.2 80.37,75.53 ; C79.2 79.22,75.53 ; C79.2 79.8,74.87 ; 183.79,90.86 U5.12 ; U5.12 183.79,92.81 ; U5.12 182.91,91.84 ; U5.12 184.66,91.84 ; 102.96,103.04 C75.2 ; C75.2 102.96,104.35 ; C75.2 103.54,103.7 ; C75.2 102.38,103.7 ; 151.43,113.83 C47.2 ; C47.2 152.58,113.83 ; C47.2 152.01,113.18 ; C47.2 152.01,114.48 ; 41.06,123.29 C38.2 ; C38.2 40.48,123.94 ; C38.2 41.64,123.94 ; 99.47,66.48 99.57,66.38 C26.1 ; 173.37,125.6 C2.2 ; C2.2 173.37,126.5 ; C2.2 172.91,126.05 ; 93.52,79.44 93.71,79.26 U10.38 ; U5.10 193.38,93.51 ; U5.10 193.38,91.96 ; U5.10 194.66,92.74 ; U5.10 192.11,92.74 ; U10.94 109.29,90.28 v1(108.84,89.83) ; U2.1 171.69,52.92 ; U2.1 170.71,51.94 ; U2.1 170.71,53.9 ; U2.1 169.74,52.92 ; C46.2 152.13,116.01 ; C46.2 151.55,115.35 ; C46.2 152.13,114.7 ; C46.2 152.71,115.35 ; C21.2 175.12,57.33 ; C21.2 175.12,56.43 ; C21.2 175.57,56.88 ; 187.53,128.64 Y2.2 187.53,129.9 ; U3.1 102.43,56.24 ; U3.1 101.85,55.91 ; U3.1 101.1,56.24 v1(99.85,57.49) ; 13.71,89.45 C27.2 ; C27.2 14.29,88.79 ; C27.2 14.31,89.42 v1(15.44,89.42) ; C27.2 14.29,90.1 ; C27.2 14.87,89.45 ; C36.2 141.59,125.44 ; C36.2 141.01,126.09 ; C36.2 C35.2 ; C36.2 140.43,125.44 ; 173.22,121.66 C1.2 ; C1.2 173.22,122.56 ; C1.2 172.76,122.11 ; 43.21,119.56 R36.1 ; R36.1 43.86,120.14 ; R36.1 43.21,120.72 ; R36.1 42.55,120.14 ; 164.25,60.06 C20.2 163.79,59.61 ; 107.09,117.4 C87.2 ; C87.2 107.74,117.98 ; C87.2 107.09,118.56 ; C87.2 106.43,117.98 ; C54.2 67.72,92.25 v1(67.72,93.56) ; C54.2 67.65,91.54 ; C54.2 67.65,92.84 ; C54.2 67.08,92.19 ; C54.2 68.23,92.19 ; C18.2 188.76,125.4 ; C18.2 189.21,124.96 ; C18.2 188.76,124.51 ; 170.48,56.81 C19.2 ; C19.2 170.93,57.26 ; C19.2 170.93,56.36 ; 147.43,123.93 v1(147.9,123.46) ; 147.43,123.93 148.03,123.93 ; 52.19,115.58 C40.2 ; C40.2 52.77,116.24 ; C40.2 52.77,114.93 ; C40.2 53.35,115.58 ; C16.1 188.75,128.38 ; C16.1 189.2,127.93 ; C16.1 188.75,127.48 ; U5.13 184.66,77.24 ; U5.13 183.79,76.46 ; U5.13 182.91,77.24 ; C7.2 175.37,120.17 ; C7.2 174.92,119.72 ; C7.2 175.37,119.27 ; R37.1 148.75,98.54 ; R37.1 148.17,97.89 ; R37.1 148.17,99.19 ; R37.1 147.59,98.54 ; 113,116.14 C85.2 ; C85.2 114.15,116.14 ; C85.2 113.58,115.49 ; C85.2 113.58,116.79 ; R53.1 103.09,107.6 ; R53.1 103.09,106.29 ; R53.1 103.66,106.95 ; R53.1 102.51,106.95 ; 176.46,117.82 C3.1 ; C3.1 176.91,117.37 ; C3.1 176.91,118.27 ; 100.21,78.76 U10.51 100.21,76.9 ; 53.99,128.39 C44.2 ; C44.2 53.99,129.7 ; C44.2 54.57,129.04 ; C44.2 53.41,129.04 ; Y3.2 47.98,123.88 ; Y3.2 47.23,124.58 ; Y3.2 47.23,123.17 ; Y3.2 46.47,123.88 ; C80.2 84.03,80.86 ; C80.2 83.45,80.21 ; C80.2 82.87,80.86 ; Q2.3 186.93,60.57 ; Q2.3 186.1,61.04 ; Q2.3 185.27,60.57 ; Q2.3 186.1,60.09 ; U15.4 53.35,90.13 ; U15.4 52.42,89.65 ; U15.4 53.35,89.17 ; U15.4 54.28,89.65 ; X1.2 180.96,138.82 ; X1.2 179.6,138.82 ; X1.2 180.28,138.4 ; C64.2 115.97,98.53 115.7,98.25 115.7,97.7 ; C64.2 117.29,98.53 ; C64.2 116.64,99.1 ; C64.2 116.64,97.95 ; v1(142.49,132.25) 141.05,130.8 v1(139.55,130.8) ; 177.18,129.18 C13.2 177.18,130.08 ; 98.91,64.9 C26.1 ; C26.1 100.22,64.9 ; C26.1 99.57,64.32 ; U3.9 100.1,57.74 v1(99.85,57.49) ; C14.2 182.77,130.76 ; C14.2 182.77,129.87 ; C14.2 183.22,130.31 ; 183.05,134.78 C15.2 183.05,133.88 ; 182.25,137.79 R3.1 ; R3.1 182.7,138.24 ; R3.1 182.25,138.69 ; 67.76,94.66 C55.2 ; C55.2 67.69,95.38 v1(67.69,96.63) ; C55.2 68.33,95.31 ; C55.2 67.18,95.31 ; C55.2 67.76,95.97 ; Y2.4 189.26,130.72 ; Y2.4 188.68,131.35 ; Y2.4 188.68,130.09 ; 111.73,84.78 U10.83 113.58,84.78 ; C76.2 91.46,102.95 ; C76.2 90.81,102.37 ; C76.2 90.81,103.52 ; C76.2 87.14,102.95 85.78,104.31 ; C37.2 146.29,127.39 ; C37.2 145.71,128.05 ; C37.2 145.13,127.39 ; C37.2 145.71,126.74 ; C51.2 153.88,126.12 ; C51.2 152.72,126.12 ; C51.2 153.3,126.78 ; C51.2 153.3,125.47 ; 92.18,89.78 U10.16 90.33,89.78 ; C39.2 41.56,125.59 ; C39.2 40.4,125.59 ; C39.2 40.98,126.24 ; 177.4,138.82 X1.3 ; X1.3 178.08,138.4 ; X1.3 178.76,138.82 ; U12.3 8.79,60.56 ; U12.3 8.79,56.71 ; U12.3 9.62,58.64 ; U12.3 7.96,58.64 ; J1.1 196.32,101.09 ; J1.1 195.34,100.11 ; J1.1 197.3,100.11 ; J1.1 196.32,99.14 ; 177.56,126.59 R2.2 177.56,127.49 ; U4.4 15.27,97.29 ; U4.4 16.14,96.42 ; U4.4 15.27,95.54 ; U4.4 14.39,96.42 ; 60,118.17 J5.1 ; J5.1 60,121.83 ; J5.1 58.17,120 ; J5.1 61.83,120 ; J6.2 141.83,120 ; J6.2 140,118.17 ; J6.2 138.17,120 ; 182.21,81.74 U5.6 ; U5.6 183.19,82.26 ; U5.6 184.16,81.74 ; U5.6 183.19,81.21 ; 116.33,84.74 C71.2 ; C71.2 116.99,85.32 ; C71.2 116.33,85.9 ; C71.2 115.68,85.32 ; 180.05,129.87 L1.2 ; L1.2 180.05,130.76 ; L1.2 179.59,130.31 ; C66.2 84.64,91.7 ; C66.2 85.22,91.05 ; C66.2 84.07,91.05 ; v1(100.48,100.6) 100.21,100.32 U10.130 ; 82.87,82.44 C83.1 84.03,82.44 ; C45.2 54.59,127.39 ; C45.2 53.43,127.39 ; C45.2 54.01,126.74 ; C45.2 54.01,128.05 ; 185.78,130.86 C17.2 ; C17.2 186.23,131.31 ; C17.2 186.68,130.86 ; C35.2 140.43,123.74 ; C35.2 141.59,123.74 ; 105.21,78.76 U10.61 105.21,76.9 ; 91.41,75.2 C68.2 ; C68.2 92.57,75.2 ; C68.2 91.99,74.54 ; C68.2 91.99,75.85
  TOP w0.152: C81.1 84.51,97.08 83.96,97.62 83.93,97.62 83.37,98.19 83.37,98.26 82.83,98.8 C78.2
  TOP w0.203: C39.2 40.98,124.72 41.06,124.64 C38.2 ; C10.2 184.12,129.42 v1(183.94,129.61) ; v1(187.3,125.54) 187.2,125.64 C11.2 ; R2.2 v1(176.56,127.04) ; C12.2 v1(176.25,128.44) ; v1(186.88,128.63) 187.53,129.27 Y2.2 ; U10.107 108.53,96.78 v1(108.31,96.56) ; C13.2 v1(176.17,129.63) ; v1(99.16,66.79) 99.47,66.48
  TOP w0.3: C15.2 v1(183.87,134.33)
  TOP w0.381: v1(47.43,75.55) 47.43,78.37 v1(46.89,78.91) ; R10.1 157.56,62.78 ; 157.56,62.78 159,61.33 v1(159,60.44) ; 157.56,62.78 161.66,62.78 163.79,60.65 C20.2
  TOP w0.508: 180.29,139.2 180.28,139.19 X1.2 ; X1.3 178.08,139.2 178.08,139.2
  BOTTOM w0.127: LED6.C 46.87,70.67 ; LED6.C 46.87,69.35 46.81,69.29 46.81,69 v1(46.84,68.97) ; LED6.C 47.45,70.02 ; LED6.C 46.3,70.02 ; C67.2 83.58,84.64 ; C67.2 83,83.99 ; C67.2 84.16,83.99 ; C67.2 83.58,83.33 ; U8.C5 49.25,121.1 ; U8.C5 48.9,120.75 ; U8.C5 49.6,120.75 ; U8.C5 49.25,120.4 ; 3.37,77.89 TP4.1 ; TP4.1 5.13,79.65 ; TP4.1 6.9,77.89 ; TP4.1 5.13,76.12 ; v1(60.55,108.42) 59.21,108.42 59.11,108.32 ; 109.16,139.14 C30.2 ; C30.2 109.73,139.79 ; C30.2 109.16,140.44 ; C30.2 108.58,139.79 ; C90.2 105.39,129.72 105.43,129.68 v1(105.94,129.68) ; C90.2 104.72,129.14 ; C90.2 104.07,129.72 ; C90.2 104.72,130.3 ; v1(180.16,124.02) 180.16,123.78 v1(181.35,122.6) v1(180.2,121.45) 180.14,121.45 ; 51.9,117.75 U8.G1 ; U8.G1 52.25,118.1 ; U8.G1 52.6,117.75 ; U8.G1 52.25,117.4 ; 86.7,139.29 C28.2 ; C28.2 86.12,139.94 ; C28.2 87.28,139.94 ; C28.2 86.7,140.59 ; 49.25,118.9 U8.E5 ; U8.E5 48.9,119.25 ; U8.E5 49.25,119.6 ; U8.E5 49.6,119.25 ; 58.17,120 J5.1 ; J5.1 60,118.17 ; J5.1 61.83,120 ; J5.1 60,121.83 ; 150,118.15 U9.F4 ; U9.F4 150,118.85 ; U9.F4 150.35,118.5 ; U9.F4 149.65,118.5 ; 147.4,120 U9.D7 ; U9.D7 147.75,120.35 ; U9.D7 148.1,120 ; U9.D7 147.75,119.65 ; 111.76,126.73 111.79,126.76 111.83,126.76 ; 103.12,124.67 U14.41 103.12,126.43 ; U8.A1 52.25,122.6 ; U8.A1 51.9,122.25 ; U8.A1 52.6,122.25 ; U8.A1 52.25,121.9 ; U9.B7 148.1,121.5 ; U9.B7 147.75,121.15 ; U9.B7 147.4,121.5 ; U8.D7 47.75,120.35 ; U8.D7 48.1,120 ; U8.D7 47.4,120 ; 47.4,122.25 U8.A7 ; U8.A7 47.75,122.6 ; U8.A7 48.1,122.25 ; 47.4,121.5 U8.B7 ; U8.B7 47.75,121.15 ; U8.B7 48.1,121.5 ; U4.4 16.14,96.42 ; U4.4 14.39,96.42 ; U4.4 15.27,95.54 ; U4.4 15.27,97.29 ; 131.91,83.2 J14.3 ; J14.3 133.87,83.2 ; J14.3 132.89,84.18 ; J14.3 132.89,82.22 ; v1(108.2,129.73) 108.85,129.73 108.86,129.74 C86.2 ; v1(149.25,119.98) 149.28,120 149.28,120.1 ; 140,118.17 J6.2 ; J6.2 141.83,120 ; J6.2 140,121.83 ; J6.2 138.17,120 ; C74.2 102.6,96.96 ; C74.2 102.6,95.65 ; C74.2 103.18,96.3 ; C74.2 102.03,96.3 ; D2.1 81.69,108.27 ; D2.1 82.72,107.6 ; D2.1 80.66,107.6 ; D2.1 81.69,106.92 ; 50.4,119.25 U8.E3 ; U8.E3 50.75,118.9 ; U8.E3 51.1,119.25 ; U8.E3 50.75,119.6 ; 149.2,120.1 149.28,120.1 ; 149.28,120.1 149.28,120.1 ; 149.28,120.1 149.25,120.13 U9.C5 ; C84.2 117.71,114.19 ; C84.2 117.13,114.84 ; C84.2 117.13,113.53 ; C84.2 116.55,114.19 ; U12.3 8.79,60.56 ; U12.3 8.79,56.71 ; U12.3 9.62,58.64 ; U12.3 7.96,58.64 ; U9.A7 148.1,122.25 ; U9.A7 147.4,122.25 ; U9.A7 147.75,122.6 ; 149.28,120.1 149.35,120.1 ; U11.1 32.82,68.39 ; U11.1 33.89,67.74 ; U11.1 32.82,67.09 ; 113,136 C33.2 ; C33.2 113,137.15 ; C33.2 113.66,136.57 ; U2.1 170.71,53.9 ; U2.1 171.69,52.92 ; U2.1 169.74,52.92 ; U2.1 170.71,51.94 ; 31.57,76.82 U13.1 ; U13.1 32.65,77.47 ; U13.1 31.57,78.12 ; C60.2 25.2,69.8 ; C60.2 26.2,68.44 ; C60.2 24.19,68.44 ; 111.92,127.3 111.92,127.26 111.88,127.26 111.92,127.22 ; 25.58,78.94 C62.2 24.57,77.59 ; v1(46.89,78.91) 46.89,79.4 46.95,79.46 LED7.C ; J6.1 160,121.83 ; J6.1 160,118.17 ; J6.1 158.17,120 ; J6.1 161.83,120 ; 40,118.17 J5.2 ; J5.2 41.83,120 ; J5.2 40,121.83 ; J5.2 38.17,120 ; 109.13,140.84 C31.2 ; C31.2 109.13,142.14 ; C31.2 108.55,141.49 ; C31.2 109.71,141.49 ; U9.C3 150.75,120.71 150.95,120.51 ; 44.97,63.39 C61.2 ; C61.2 47.68,63.39 ; C61.2 46.33,62.38 ; C63.2 45.82,76.15 ; C63.2 44.47,75.15 ; C63.2 45.82,74.14 ; 49.65,118.5 U8.F4 ; U8.F4 50,118.85 ; U8.F4 50.35,118.5 ; U8.F4 50,118.15 ; C29.2 86.68,142.32 ; C29.2 86.1,141.67 ; C29.2 86.68,141.02 ; C29.2 87.26,141.67 ; v1(109.47,115.48) 109.52,115.43 U14.6 ; v1(60.53,105.47) 59.36,105.47 59.23,105.6 ; 27.74,69.2 27.74,69.34 27.79,69.39 27.79,69.89 ; 152.25,118.15 U9.F1 ; U9.F1 152.6,118.5 ; U9.F1 151.9,118.5 ; 109.53,129.16 C86.2 ; C86.2 109.53,130.32 ; C86.2 110.18,129.74 ; 151.9,117.75 U9.G1 ; U9.G1 152.25,118.1 ; U9.G1 152.6,117.75 ; v1(104.75,115.68) 104.72,115.66 U14.12 ; C32.2 92.14,137.57 ; C32.2 91.49,136.99 ; C32.2 91.49,138.14 ; U12.2 11.79,54.66 ; U12.2 13.72,53.84 ; U12.2 11.79,53.01 ; U12.2 9.86,53.84 ; U9.C5 149.6,120.75 ; U9.C5 148.9,120.75 ; 196.32,99.14 J1.1 ; J1.1 196.32,101.09 ; J1.1 197.3,100.11 ; J1.1 195.34,100.11 ; 152.25,122.6 U9.A1 152.6,122.25 ; 111.92,127.22 111.84,127.22 111.84,127.19 111.71,127.19 111.56,127.04 111.65,127.04 111.65,126.94 111.58,126.87 111.58,126.85 111.56,126.83 111.64,126.75 111.64,126.72 111.79,126.57 111.84,126.57 111.84,126.53 111.92,126.44 U14.52 ; 111.92,127.22 111.81,127.1 111.81,126.93 111.92,126.93 111.92,126.82 111.83,126.82 111.83,126.76 ; J10.4 70.42,70.95 ; J10.4 69.44,69.98 ; J10.4 69.44,71.93 ; J10.4 68.47,70.95 ; U9.E5 149.6,119.25 ; U9.E5 149.25,118.9 ; U9.E5 148.9,119.25 ; U9.E5 149.25,119.6 ; U8.C3 51.1,120.75 ; U8.C3 50.75,120.4 ; U8.C3 50.4,120.75 ; U8.C3 50.75,121.1 ; 46.37,80.33 LED7.C ; LED7.C 46.95,80.98 ; LED7.C 47.53,80.33 ; U14.54 113.52,126.59 112.88,127.24 ; U14.46 v1(107.12,127.11) ; 111.83,126.76 111.86,126.73 111.86,126.89 v1(111.79,126.96) ; U9.E3 150.75,119.6 ; U9.E3 150.4,119.25 ; U9.E3 151.1,119.25 ; U9.E3 150.75,118.9 ; 92.72,126.43 92.72,125.98
  BOTTOM w0.203: C32.2 90.79,137.57 90.24,137.02 U6.2 ; C33.2 112.3,136.57 111.75,136.02 U7.2 ; v1(149.25,119.98) U9.C5
  BOTTOM w0.381: C63.2 46.94,75.15 47.35,75.55 v1(47.43,75.55) ; C60.2 v1(25.2,66.76) ; v1(47.12,65.37) 46.33,64.58 C61.2 ; v1(31.36,67.74) U11.1 32.58,67.97 ; U13.1 26.84,77.47 26.72,77.59 C62.2 v1(25.58,75.7)
  BOTTOM w0.508: v1(91.59,126.61) 92.09,126.61 92.72,125.98 U14.28
  vias: v1(29.59,74.16) v1(30.93,126.54) v1(30.93,123.77) v1(30.98,132.5) v1(30.98,129.74) v1(31.03,120.44) v1(31.03,117.67) v1(32.51,112.64) v1(32.51,109.87) v1(32.54,106.54) v1(32.54,103.77) v1(33.96,137.27) v1(36.73,139.81) v1(37.59,74.82) v1(38.35,104.05) v1(38.61,110.15) v1(39.07,96.3) v1(39.65,142.63) v1(40.06,102.22) v1(40.82,110.05) v1(41.4,100.55) v1(41.5,85.26) v1(41.55,130.34) v1(41.68,93.31) v1(41.78,104.94) v1(42.88,145.86) v1(44.37,133.21) v1(44.6,90.39) v1(45.03,106.01) v1(47.1,140.95) v1(47.94,145.86) v1(49.74,136.25) v1(49.8,132.9) v1(50.01,120.05) v1(51.14,140.95) v1(51.49,94.2) v1(51.64,89.67) v1(51.66,82.99) v1(51.98,145.86) v1(53.04,81.6) v1(53.07,122.83) v1(53.06,88.02) v1(53.78,136.25) v1(53.83,132.9) v1(54.93,140.78) v1(54.92,117.76) v1(55.52,90.03) v1(55.78,78.85) v1(55.88,85.13) v1(56.64,88.02) v1(56.96,145.91) v1(57.53,76.9) v1(57.91,83.17) v1(58.42,93.28) v1(58.47,90.16) v1(58.97,140.78) v1(59.07,136.2) v1(59.55,129.73) v1(59.51,113.35) v1(59.85,131.86) v1(60.38,88.05) v1(61,145.91) v1(61.34,95.8) v1(61.57,81.04) v1(62.48,78.17) v1(62.97,88.07) v1(63.11,136.2) v1(63.59,129.73) v1(63.89,131.86) v1(63.88,73.49) v1(64.52,94.91) v1(65.33,106.57) v1(65.53,87.95) v1(65.94,93.43) v1(66.56,145.8) v1(67.62,117.26) v1(67.77,73.49) v1(70.1,117.16) v1(70.21,77.81) v1(70.32,53.6) v1(70.6,145.8) v1(70.79,72.83) v1(72.16,114.97) v1(72.75,74.49) v1(72.8,70.47) v1(73.38,112.33) v1(73.36,109.97) v1(73.36,106.74) v1(74.36,53.6) v1(75.18,72.17) v1(76.01,145.8) v1(76.89,70.57) v1(77.11,85.71) v1(77.23,140.78) v1(78.23,62.95) v1(78.41,60.34) v1(78.77,93.71) v1(79.91,85.79) v1(80.05,145.8) v1(80.11,66.87) v1(80.11,64.55) v1(80.11,59.6) v1(80.19,61.81) v1(80.57,93.66) v1(81.27,140.78) v1(82.56,127.24) v1(82.86,62.47) v1(82.93,59.6) v1(84.46,145.73) v1(85.12,103.97) v1(86.6,127.24) v1(87.81,59.37) v1(88.49,145.73) v1(89.15,62.04) v1(89.92,58.71) v1(91.72,60.64) v1(92.75,145.68) v1(92.79,139.31) v1(93.42,89.83) v1(93.85,136.28) v1(94.77,60.82) v1(95.05,138.34) v1(95.12,66.59) v1(95.48,130.77) v1(95.83,54.09) v1(95.91,55.89) v1(95.99,57.8) v1(96.52,136.41) v1(96.62,90.21) v1(96.7,93.43) v1(96.67,86.47) v1(96.79,145.68) v1(97.13,139.1) v1(97.16,141.97) v1(97.26,66.71) v1(97.71,53.86) v1(98.45,129.81) v1(99.11,138.26) v1(99.24,86.78) v1(99.31,93.87) v1(99.26,91.76) v1(99.29,89.62) v1(99.75,72.45) v1(99.7,69.1) v1(100.36,84.44) v1(100.79,139.38) v1(101.46,145.68) v1(101.96,53.07) v1(102.18,82.54) v1(102.31,138.26) v1(102.36,141.95) v1(102.51,93.94) v1(102.84,127.11) v1(103.23,59.02) v1(103.28,57.21) v1(103.35,60.72) v1(103.51,92.11) v1(104.01,89.9) v1(103.99,87.13) v1(103.96,84.57) v1(103.96,67.07) v1(104.06,69.63) v1(104.17,139.36) v1(105.5,145.68) v1(105.49,54.24) v1(105.69,56.78) v1(105.87,138.26) v1(106.63,66.94) v1(107.65,89.45) v1(107.7,87.19) v1(107.7,84.82) v1(107.72,69.63) v1(107.77,56.2) v1(108.1,63.21) v1(108.05,59.88) v1(108.26,91.76) v1(108.38,93.66) v1(108.72,53.22) v1(108.86,83.05) v1(110.29,84.75) v1(110.31,59.02) v1(110.49,62.34) v1(111.09,145.73) v1(112.51,142.32) v1(112.55,138.65) v1(112.76,53.22) v1(114.07,66.38) v1(114.64,69.02) v1(115.12,145.73) v1(115.54,138.72) v1(116.39,53.35) v1(116.55,142.32) v1(116.71,131.79) v1(116.72,129.29) v1(118.44,66.54) v1(118.68,69.02) v1(119.53,145.71) v1(120.43,53.35) v1(120.76,129.29) v1(121.11,131.74) v1(121.68,136.66) v1(122.74,69.15) v1(124.14,139.12) v1(124.69,90.54) v1(124.97,66.66) v1(125.59,129.17) v1(125.72,136.66) v1(126.78,69.15) v1(127.03,104.97) v1(127.49,73.77) v1(128.18,139.12) v1(128.65,85.59) v1(129.63,129.17) v1(130.2,107.89) v1(130.25,104.84) v1(130.3,82.23) v1(130.63,97.45) v1(130.95,136.79) v1(131.53,73.77) v1(131.61,56.24) v1(132.35,68.87) v1(133.05,106.13) v1(133.11,139.1) v1(133.25,110.32) v1(133.27,115.63) v1(133.32,112.92) v1(133.3,93.61) v1(133.55,144.34) v1(133.68,141.77) v1(134.99,136.79) v1(135.65,56.24) v1(136.38,68.87) v1(137.15,139.1) v1(137.44,144.31) v1(137.39,93.48) v1(137.8,73.83) v1(137.92,141.87) v1(139.46,136.63) v1(140.77,141.92) v1(141.07,107.73) v1(141.15,103.29) v1(142.47,144.13) v1(143.5,136.63) v1(143.61,109.92) v1(143.89,139.03) v1(143.97,105.3) v1(144.04,102.68) v1(143.97,94.55) v1(144.5,80.99) v1(144.68,73.52) v1(145.36,107.05) v1(145.44,83.71) v1(145.67,142.25) v1(145.87,100.29) v1(146.48,96.63) v1(146.61,86.91) v1(146.58,79.11) v1(147.33,68.31) v1(147.57,109.26) v1(147.57,105.73) v1(148.06,90.89) v1(148.34,80.91) v1(148.46,142.3) v1(150.04,83.6) v1(150.42,138.95) v1(151.14,142.22) v1(151.37,68.31) v1(151.46,86.96) v1(152.1,100.24) v1(152.59,75.52) v1(152.74,136.5) v1(152.68,96.81) v1(152.76,90.79) v1(152.94,140.67) v1(153.09,118.58) v1(153.54,123.15) v1(154.77,134.6) v1(154.98,138.76) v1(155.85,83.65) v1(156.26,133.03) v1(156.62,79.61) v1(156.63,75.52) v1(156.86,68.31) v1(157.16,136.88) v1(158.24,90.72) v1(158.29,131.13) v1(159.03,100.34) v1(159.19,134.98) v1(159.16,86.96) v1(160.25,56.71) v1(160.34,75.4) v1(160.43,128.99) v1(160.4,54.42) v1(160.66,79.61) v1(160.81,93.28) v1(160.9,68.31) v1(161.25,132.79) v1(161.16,96.2) v1(162.43,127.24) v1(162.51,91.1) v1(163.09,147.23) v1(163.22,143.01) v1(163.22,141.06) v1(163.22,139) v1(163.35,145.58) v1(163.28,130.89) v1(164.23,137.63) v1(164.38,75.4) v1(164.84,120.22) v1(164.84,118.04) v1(164.82,115.75) v1(164.8,113.35) v1(164.85,109.28) v1(164.92,127.01) v1(164.9,124.73) v1(164.87,122.51) v1(164.96,129.08) v1(165.1,140.14) v1(165.23,105.3) v1(165.28,148.02) v1(165.28,146.19) v1(165.28,144.18) v1(165.28,142.05) v1(165.3,102.93) v1(165.53,136.28) v1(165.46,99.35) v1(166.14,94.6) v1(166.19,137.6) v1(166.22,90.84) v1(166.42,111.06) v1(166.6,113.75) v1(166.62,68.39) v1(166.74,59.55) v1(166.88,119.93) v1(166.88,118.17) v1(166.95,145.02) v1(167.03,141.14) v1(167.03,139.53) v1(166.99,127.18) v1(167.01,121.58) v1(167.08,143.01) v1(167.11,107.12) v1(167.21,148.68) v1(167.16,146.98) v1(167.48,136.26) v1(167.74,115.18) v1(167.82,109.84) v1(167.89,111.42) v1(167.97,117.18) v1(168.22,124.19) v1(168.63,55.46) v1(168.88,122.06) v1(168.88,120.18) v1(168.96,137.63) v1(169.42,107.66) v1(169.39,81.22) v1(169.37,65.9) v1(169.57,125.67) v1(169.7,94.7) v1(169.79,136.28) v1(169.98,90.84) v1(170.36,123.71) v1(170.56,111.37) v1(170.74,115.28) v1(170.69,113.22) v1(170.69,99.07) v1(170.78,59.55) v1(170.91,137.6) v1(171.15,127.32) v1(171.12,79.31) v1(171.3,75.04) v1(171.45,109.64) v1(171.53,96.51) v1(171.75,136.26) v1(172.06,125.49) v1(172.52,111.16) v1(172.57,114.19) v1(172.85,128.1) v1(173.12,137.63) v1(173.33,62.29) v1(173.84,129.2) v1(173.84,108.65) v1(173.94,136.11) v1(174.09,90.59) v1(174.24,131.08) v1(174.22,112.84) v1(174.35,102.48) v1(174.96,115.63) v1(175.01,99.25) v1(175.08,137.6) v1(175.34,75.04) v1(175.59,131.89) v1(175.74,127.57) v1(175.89,136.08) v1(176.4,110.66) v1(176.61,114.59) v1(176.57,96.4) v1(176.56,55.64) v1(177.21,137.6) v1(177.22,112.53) v1(177.42,131.94) v1(178.21,136.03) v1(178.44,81.95) v1(178.51,78.42) v1(178.84,133.24) v1(178.79,114.54) v1(178.89,132.04) v1(179.17,137.58) v1(179.17,130.34) v1(179.27,112.41) v1(179.81,135.78) v1(179.81,134.48) v1(179.83,127.75) v1(179.91,133.21) v1(179.93,132.04) v1(179.91,131.23) v1(179.88,129.43) v1(179.86,128.56) v1(180.59,136.72) v1(180.61,96.4) v1(181.03,81.93) v1(181.1,78.45) v1(181.13,71.13) v1(181.48,114.54) v1(181.92,112.53) v1(182.42,136.74) v1(182.58,135.55) v1(182.8,129.5) v1(182.8,128.69) v1(182.91,133.13) v1(182.91,132.07) v1(182.91,131.28) v1(183.62,137.5) v1(183.64,130.31) v1(183.87,135.55) v1(183.87,133.13) v1(184.48,136.41) v1(185.17,71.13) v1(185.57,137.48) v1(185.57,112.59) v1(185.93,134.53) v1(186.03,116.4) v1(186.43,136.38) v1(186.83,79.26) v1(187.47,137.45) v1(187.91,114.87) v1(187.97,91.14) v1(188.16,118.58) v1(188.19,112.53) v1(188.26,136.23) v1(188.32,134.4) v1(189.43,137.43) v1(189.94,125.21) v1(189.94,120.13) v1(190.14,134.48) v1(190.09,123.02) v1(190.07,121.6) v1(190.22,136.21) v1(190.42,117.18) v1(190.53,131.1) v1(190.5,129.37) v1(190.47,127.7) v1(190.5,112.59) v1(190.51,71.08) v1(190.55,114.41) v1(190.87,79.26) v1(191.28,137.43) v1(191.9,134.28) v1(192.01,91.14) v1(192.17,136.11) v1(192.33,123.13) v1(192.28,121.55) v1(192.33,120) v1(192.35,131.15) v1(192.35,129.4) v1(192.53,127.5) v1(192.63,124.73) v1(192.81,132.75) v1(193.24,137.4) v1(193.9,114.54) v1(193.85,112.59) v1(194.13,136.08) v1(194.11,134.23) v1(194.54,71.08) v1(195.47,137.4) v1(195.63,124.73) v1(196.24,122.52) v1(196.36,135.98) v1(196.55,134.1) v1(197.43,137.38) v1(197.46,123.91) v1(197.51,120.82) v1(197.56,116.37) v1(197.69,113.07) v1(198.32,135.95)
